# Altium PCB Controller_Board.PcbDoc (part 1 of 2)
Units mm, origin at the board's own origin, x right, y up, seen from the top; angles counter-clockwise.
Board outline 35 x 30 mm, 4 copper layers (Top Layer, L2 (GND), L3 (PWR), Bottom Layer), stack 1.503 mm thick; 48 components, 52 nets, 230 pads, 106 vias.
Unrouted connection lines stored in the file: 17.
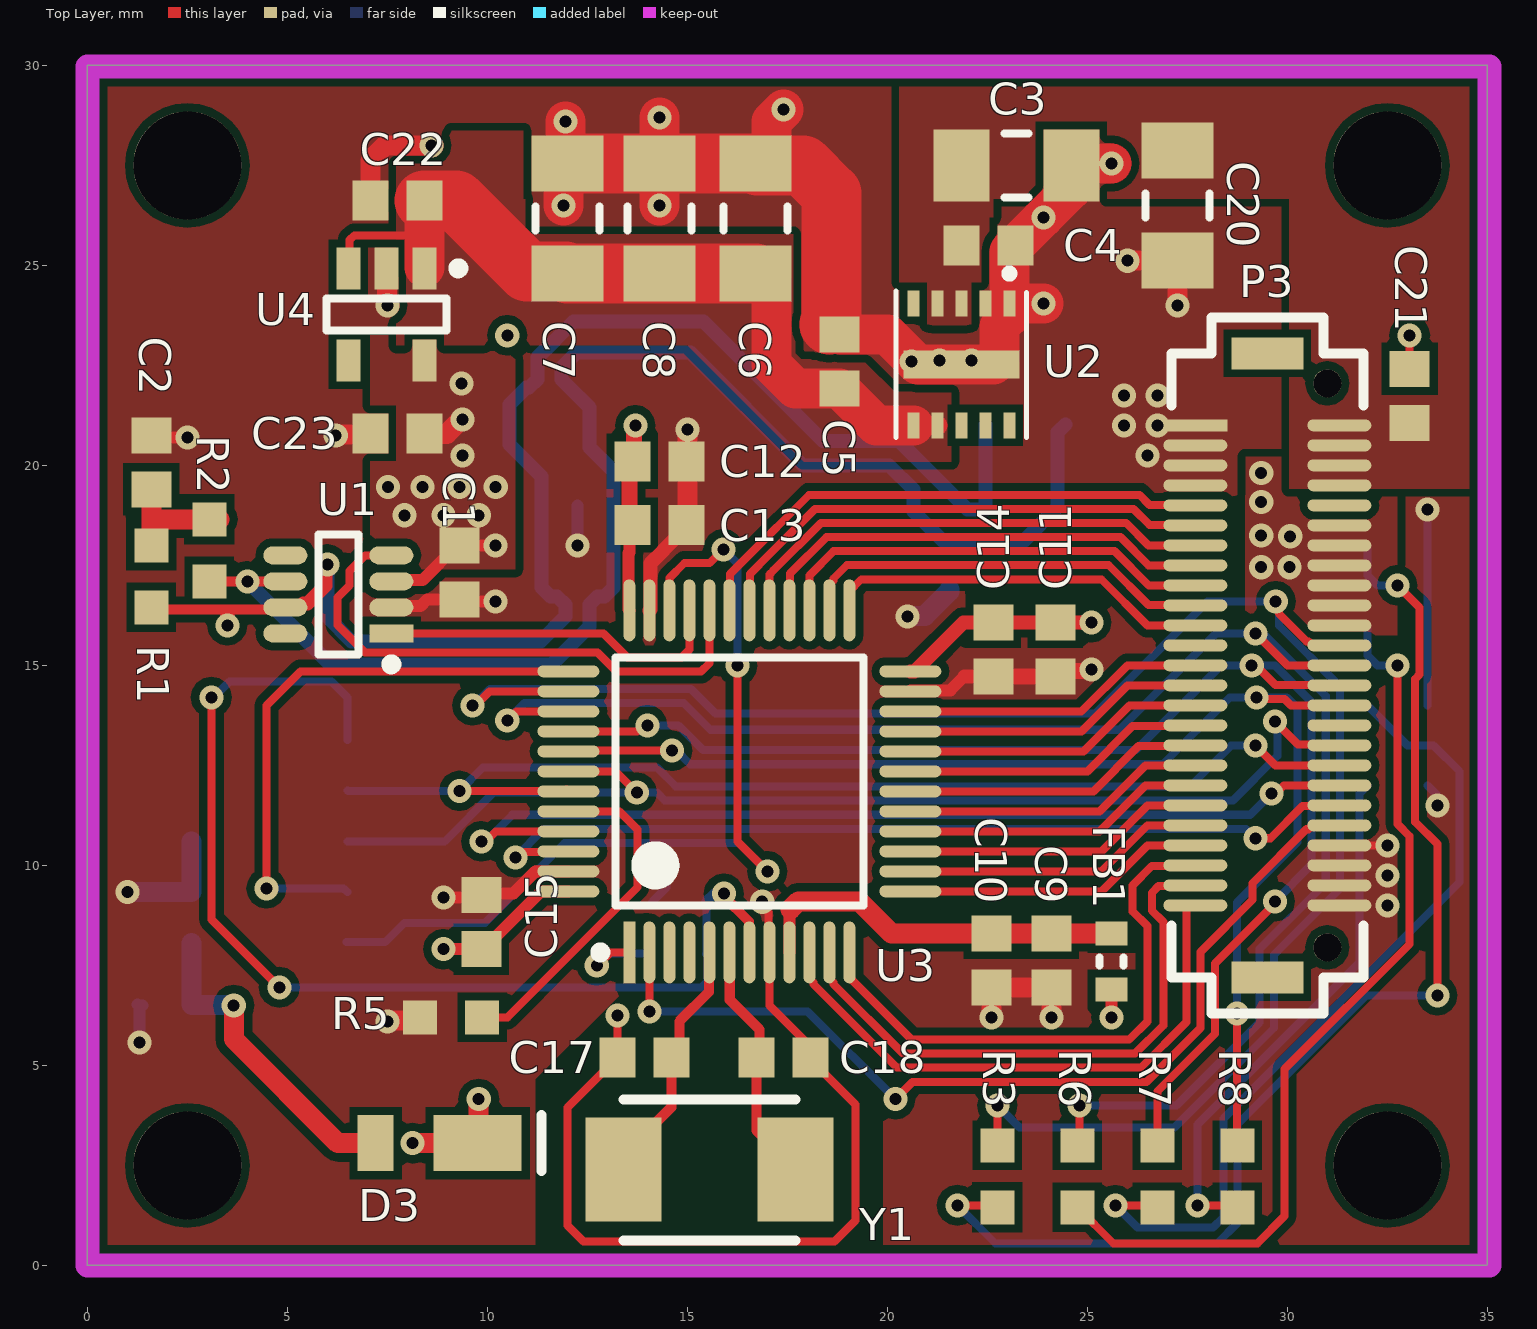
[diagram p0: Top Layer view]
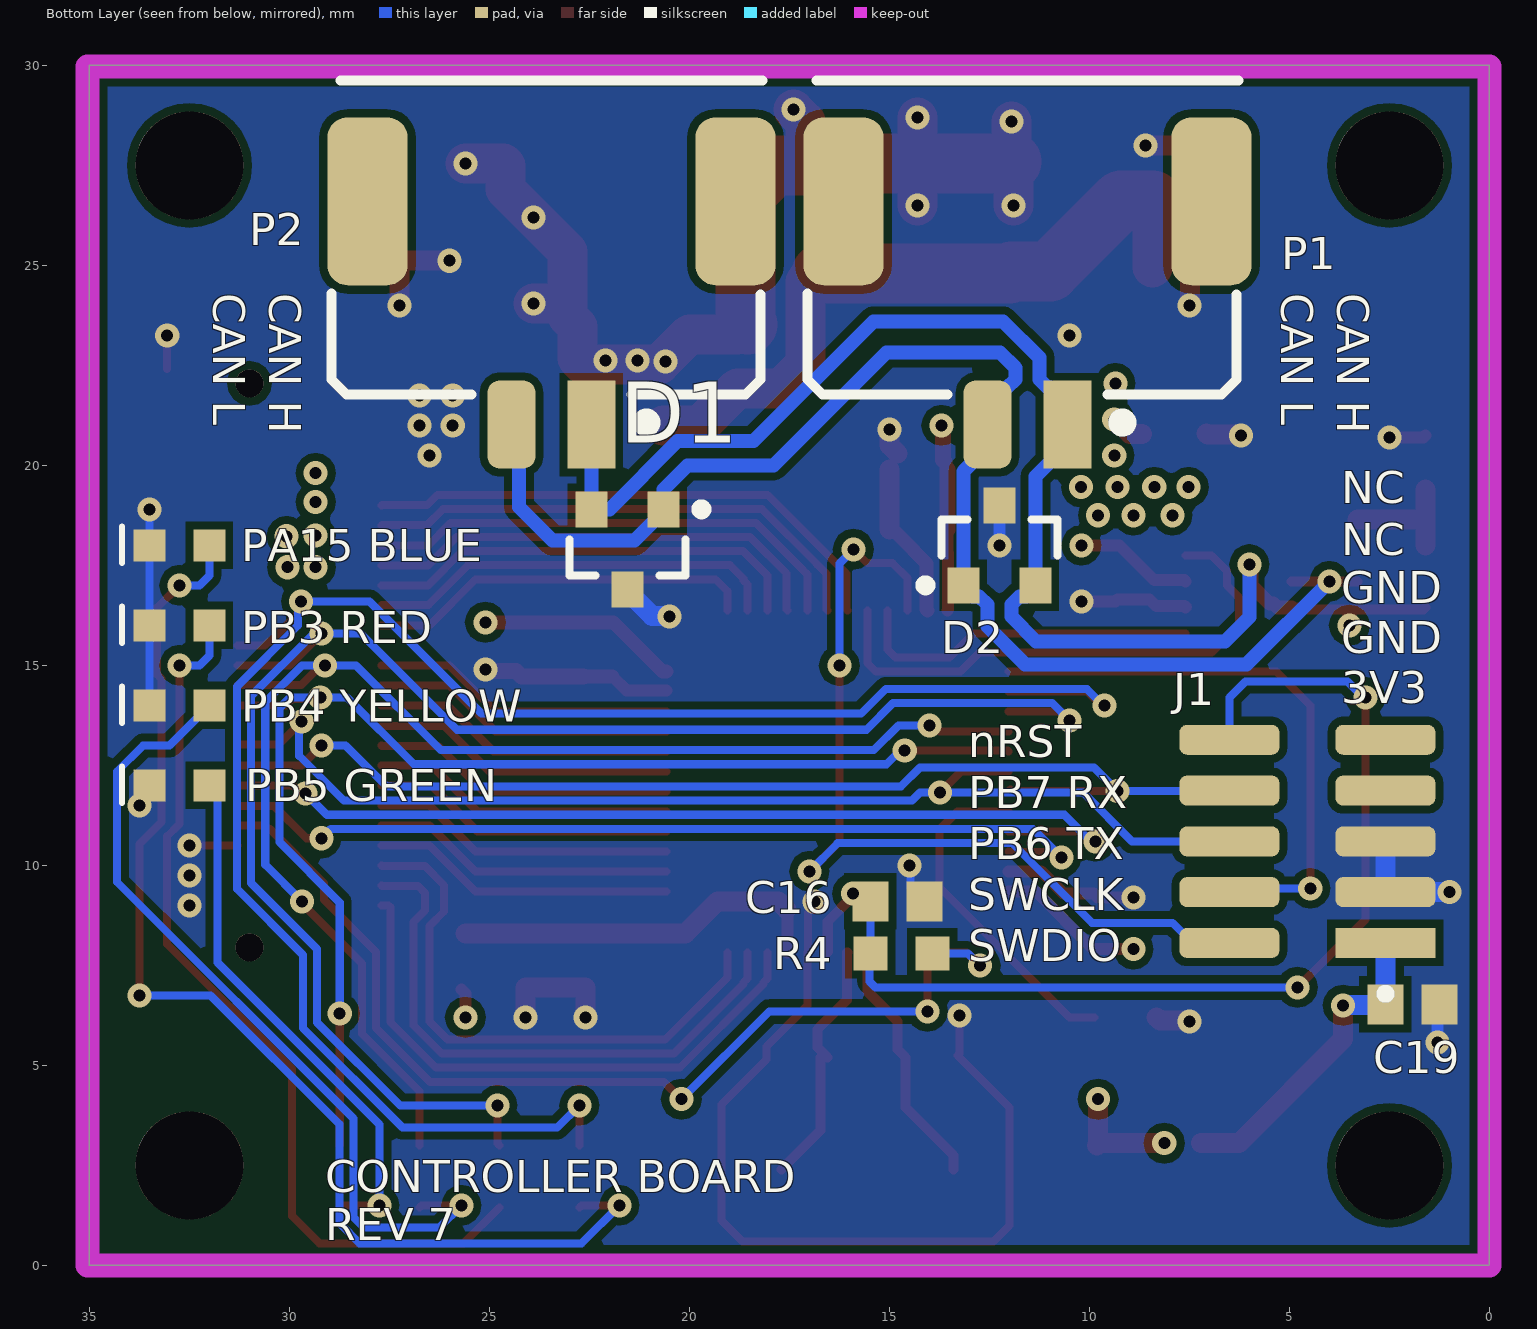
[diagram p1: Bottom Layer view, seen from below]
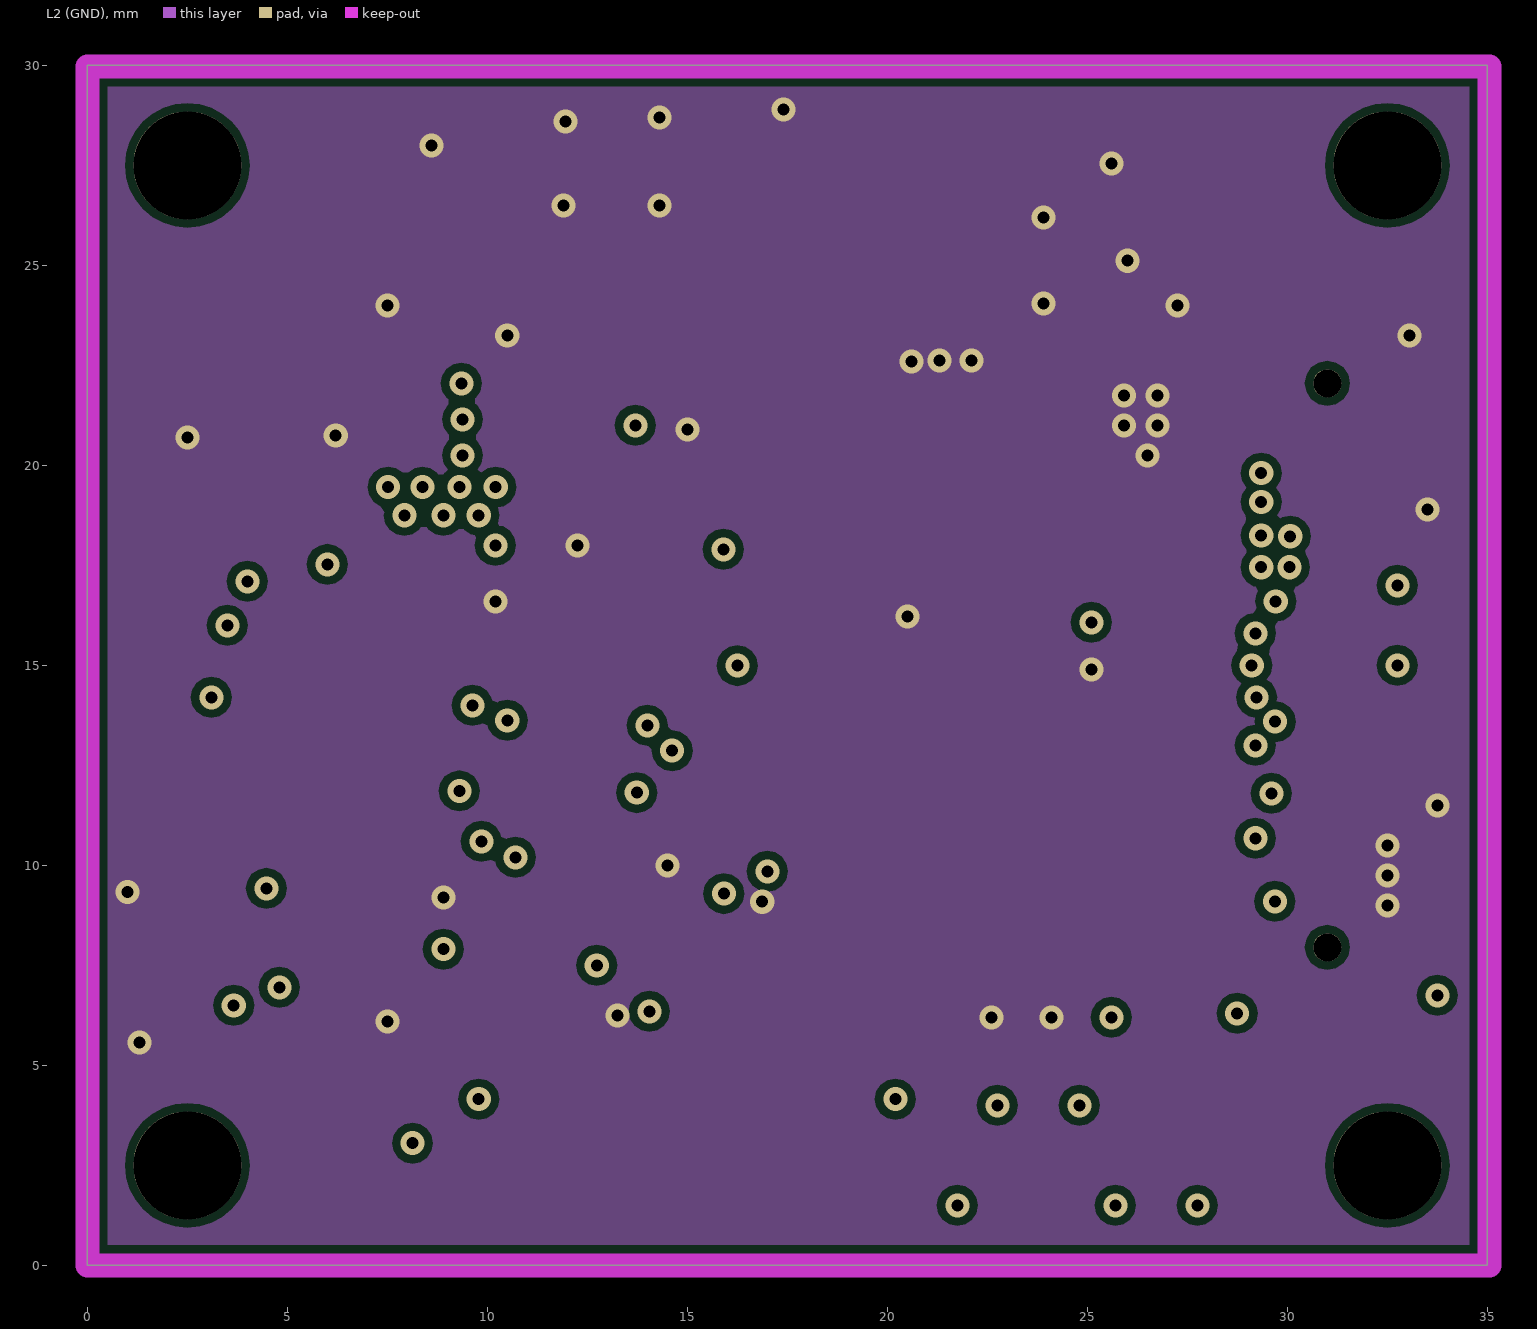
[diagram p2: L2 (GND)]
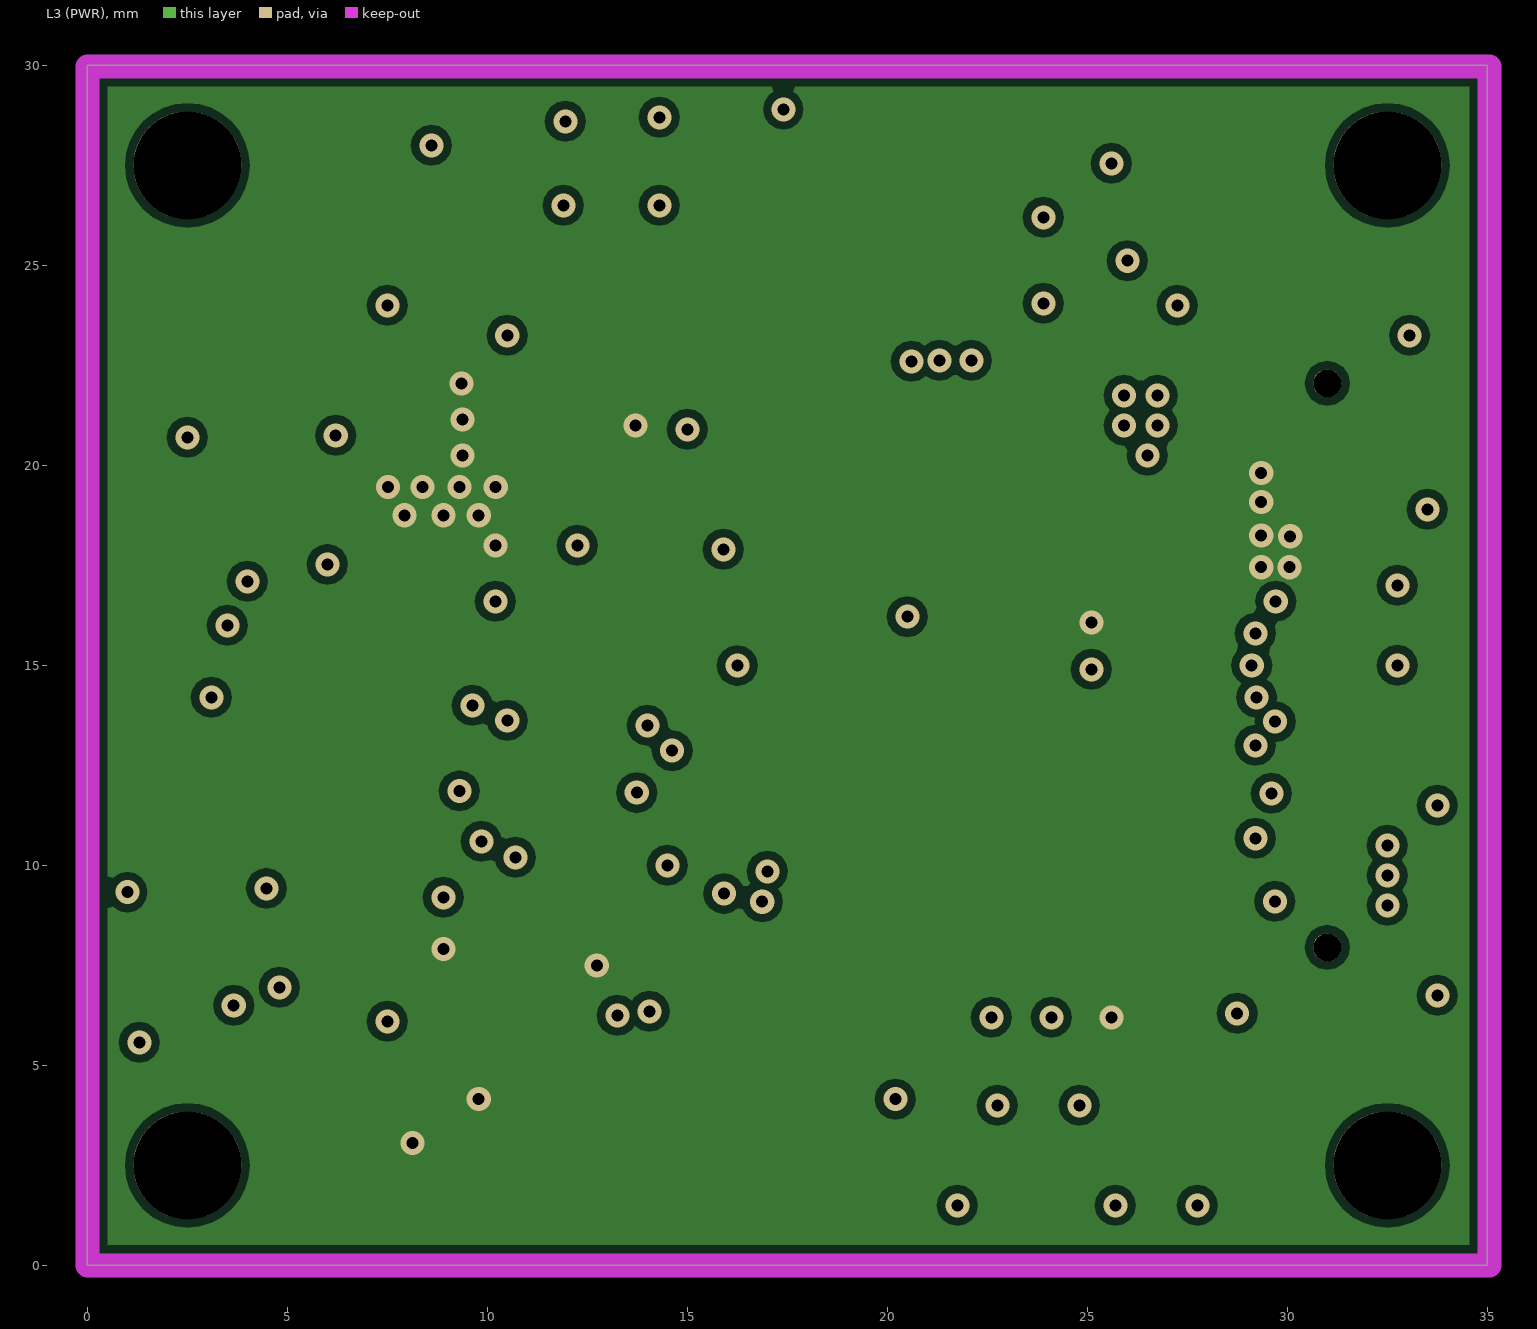
[diagram p3: L3 (PWR)]
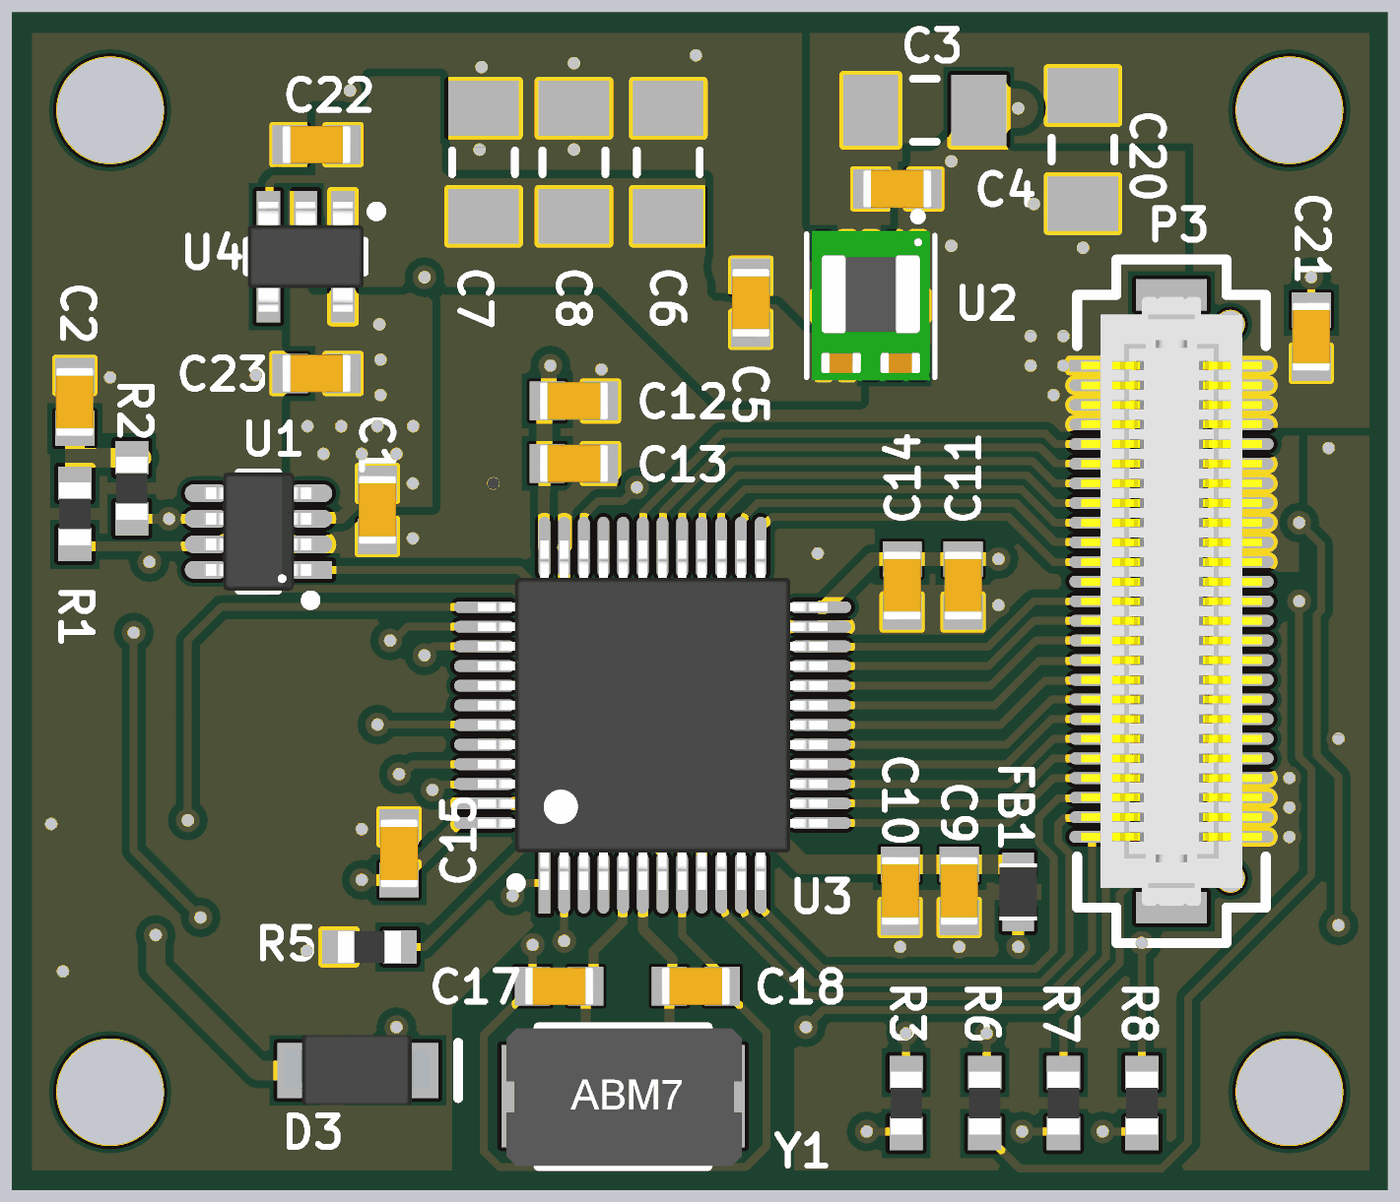
[diagram p4: 3D render of the assembled board from above, using the file's embedded part models]
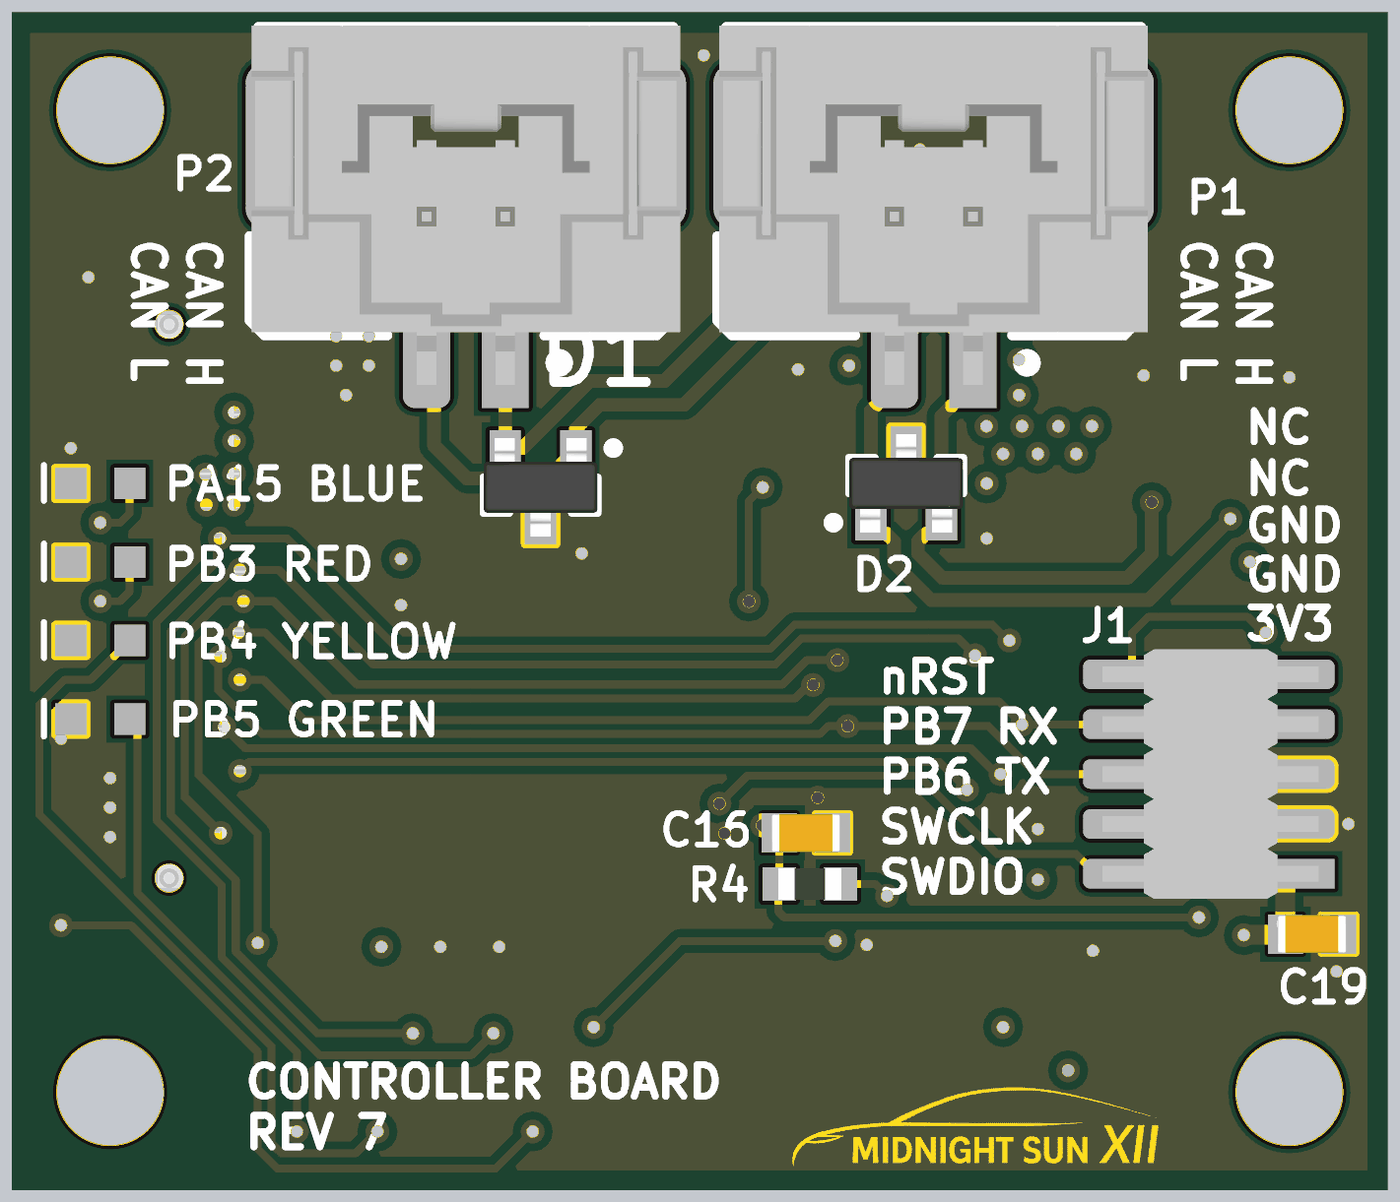
[diagram p5: 3D render of the assembled board from below, using the file's embedded part models]

## Layer stack, top to bottom
Top Solder: solder mask 0.0254, SM-001, Dk 4
Top Layer: signal copper 0.0356
Dielectric 2: prepreg 0.2083, PP-022, Dk 4.5
L2 (GND): signal copper 0.0178
Dielectric 3: core 0.98, Core-039, Dk 4.8
L3 (PWR): signal copper 0.0178
Dielectric 4: prepreg 0.2083, PP-022, Dk 4.5
Bottom Layer: signal copper 0.0356
Bottom Solder: solder mask 0.0254, SM-001, Dk 4

## Board outline
0,0 35,0 35,30 0,30

## Design rules (kind name [scope] priority, off if disabled: settings)
Clearance [All] p1: gap=0.152 ignorepadtopadclearanceinfootprint=TRUE except(0: Arc-Hole Track-Hole SMDPad-Hole THPad-Hole Via-Hole Fill-Hole Poly-Hole Region-Hole Text-Hole; 0.2: Arc-Poly Track-Poly SMDPad-Poly THPad-Poly Via-Poly Fill-Poly Poly-Poly Poly-Region Poly-Text)
ComponentClearance ComponentClearance_LEDs [InComponent('P3') vs InComponent('D2') or InComponent('D3') or InComponent('D4') or InComponent('D5')] p1: gap=0.254 collisioncheckmode=3 verticalgap=0 showdistances=FALSE
ComponentClearance [All] p2: gap=0.254 collisioncheckmode=3 verticalgap=0.254 showdistances=FALSE
DiffPairsRouting [InDifferentialPair('CAN')] p1: maxlimit=0.254 minlimit=0.2 mostfreqgap=0.254 toplayer_minwidth=0.2 toplayer_maxwidth=0.381 toplayer_prefwidth=0.254 midlayer1_minwidth=0.2 midlayer1_maxwidth=0.381 midlayer1_prefwidth=0.254 midlayer2_minwidth=0.2 midlayer2_maxwidth=0.381 midlayer2_prefwidth=0.254 bottomlayer_minwidth=0.2 bottomlayer_maxwidth=0.381 bottomlayer_prefwidth=0.254 maxuncoupledlength=25
HoleSize [All] p1: absolutevalues=TRUE maxlimit=3 minlimit=0.025 maxpercent=80.000 minpercent=20.000
MinimumSolderMaskSliver [All] p1: minsoldermaskwidth=0
PlaneClearance [All] p1: clearance=0.4
PlaneConnect [All] p1: planeconnectstyle=Direct reliefexpansion=0 reliefentries=4 reliefconductorwidth=0.254 reliefairgap=0.254
PolygonConnect [IsPad] p1: connectstyle=Direct reliefconductorwidth=0.254 reliefentries=4 polygonreliefangle="90 Angle" airgapwidth=0.254
PolygonConnect PolygonConnect_Via [Not(IsPad)] p2: connectstyle=Direct reliefconductorwidth=0.254 reliefentries=4 polygonreliefangle="90 Angle" airgapwidth=0.254
RoutingVias [All] p1: holewidth=0.3 width=0.6 viastyle="Through Hole" minholewidth=0.3 minwidth=0.6 maxholewidth=6.3 maxwidth=6.605
SilkToSilkClearance [All] p1: silktosilkclearance=0.15
SilkToSolderMaskClearance [IsPad] p1: minsilkscreentomaskgap=0.15 clearancetoexposedcopper=TRUE
SolderMaskExpansion [All] p1: expansion=0.102
Width [All] p1: maxlimit=5 minlimit=0.152 preferedwidth=0.2
22 further rules are at their usual default settings.

## Classes and differential pairs
component class "Controller Board - Microcontroller": C9 C10 C11 C12 C13 C14 C15 C16 C17 C18 FB1 "PA15 BLUE" "PB3 RED" "PB4 YELLOW" "PB5 GREEN" R3 R4 R5 R6 R7 R8 U3 Y1
component class "Controller Board - Connectors": C19 C20 C21 D1 D2 D3 J1 P1 P2 P3
component class Controller_Board: C1 C2 C3 C4 C5 C6 C7 C8 C22 C23 R1 R2 U1 U2 U4
differential pair CAN: +CAN_P -CAN_N

## Components (designator, comment, footprint, x,y, rotation, side; value= is the part's Value field where it differs from the comment)
C1 "CAP CER 0.1UF 50V 10% X7R 0603" "CAP, 0603" 9.3,17.325 r270 top
C2 "CAP CER 10nF 50V 5% X7R 0603" "CAP, 0603" 1.6,20.075 r90 top
C3 "CAP CER 10uF 50V 20% X5R 1206" "CAP, 1206" 23.225,27.5 r0 top
C4 "CAP CER 0.1UF 50V 10% X7R 0603" "CAP, 0603" 22.525,25.5 r0 top
C5 "CAP CER 0.1UF 50V 10% X7R 0603" "CAP, 0603" 18.8,22.6 r90 top
C6 "CAP CER 47uF 6.3V X5R 1206" "CAP, 1206" 16.7,26.175 r90 top
C7 "CAP CER 47uF 6.3V X5R 1206" "CAP, 1206" 12,26.175 r90 top
C8 "CAP CER 47uF 6.3V X5R 1206" "CAP, 1206" 14.3,26.175 r90 top
C9 "CAP CER 1UF 50V 10% X7R 0603" "CAP, 0603" 24.1,7.625 r270 top
C10 "CAP CER 10nF 50V 5% X7R 0603" "CAP, 0603" 22.6,7.625 r270 top
C11 "CAP CER 4.7UF 25V 10% X5R 0603" "CAP, 0603" 24.2,15.4 r270 top
C12 "CAP CER 4.7UF 25V 10% X5R 0603" "CAP, 0603" 14.3,20.1 r0 top
C13 "CAP CER 0.1UF 50V 10% X7R 0603" "CAP, 0603" 14.3,18.509 r0 top
C14 "CAP CER 0.1UF 50V 10% X7R 0603" "CAP, 0603" 22.65,15.4 r270 top
C15 "CAP CER 0.1UF 50V 10% X7R 0603" "CAP, 0603" 9.85,8.581 r90 top
C16 "CAP CER 0.1UF 50V 10% X7R 0603" "CAP, 0603" 14.8,9.1 r0 bottom
C17 "CAP CER 15PF 50V ±5% NPO 0603" "CAP, 0603" 13.925,5.2 r0 top
C18 "CAP CER 15PF 50V ±5% NPO 0603" "CAP, 0603" 17.4,5.2 r180 top
C19 "CAP CER 10nF 50V 5% X7R 0603" "CAP, 0603" 1.925,6.525 r180 bottom
C20 "CAP CER 10uF 50V 20% X5R 1206" "CAP, 1206" 27.25,26.5 r270 top
C21 "CAP CER 0.1UF 50V 10% X7R 0603" "CAP, 0603" 33.055,21.736 r90 top
C22 "CAP CER 0.1UF 50V 10% X7R 0603" "CAP, 0603" 7.75,26.625 r180 top
C23 "CAP CER 4.7UF 25V 10% X5R 0603" "CAP, 0603" 7.75,20.8 r180 top
D1 "DIODE TVS 24VWM 70VC SOT23" "MOSFET P-CH 30V 3.8A SOT-23" 21.55,17.9 r270 bottom
D2 "DIODE TVS 24VWM 70VC SOT23" "MOSFET P-CH 30V 3.8A SOT-23" 12.25,18 r90 bottom
D3 "DIODE SCHOTTKY 30V 1A POWERDI123" "DIODE SCHOTTKY 30V 1A POWERDI123" 7.205,3.055 r0 top
FB1 "FB 600 OHM 1LN 0603" "FB 0603" 25.6,7.6 r90 top
J1 "CONN 10POS HEADR MALE 0.05\"" "CONN, 10POS 0.05\" Debug Header" 2.6,8.06 r90 bottom locked
P1 "Dura-Clik" "CONN, 2POS Dura-Click Vertical" 10.55,21.02 r0 bottom locked
P2 "Dura-Clik" "CONN, 2POS Dura-Click Vertical" 22.45,21.02 r0 bottom locked
P3 "CONN 50POS Bergstak Receptacle 0.02\"" "CONN, Bergstak 50 Pos Receptacle" 29.5,15 r0 top locked
"PA15 BLUE" "LED BLUE CLEAR 2.8V 0603" LED_0603 32.05,18.01 r0 bottom (schematic designator LED1)
"PB3 RED" "LED RED CLEAR 2V 0603" LED_0603 32.05,16.01 r0 bottom (schematic designator LED2)
"PB4 YELLOW" "LED YELLOW CLEAR 2.1V 0603" LED_0603 32.05,14.01 r0 bottom (schematic designator LED3)
"PB5 GREEN" "LED GREEN CLEAR 2V 0603" LED_0603 32.05,12.01 r0 bottom (schematic designator LED4)
R1 "62R" "RES, 0603" 1.6,17.225 r90 top value=62
R2 "62R" "RES, 0603" 3.05,17.875 r270 top value=62
R3 "RES 510 OHM 5% 1/10W 0603" "RES, 0603" 22.75,2.225 r270 top
R4 "RES 100K OHM 5% 1/8W 0603" "RES, 0603" 14.7,7.8 r180 bottom
R5 "RES 510 OHM 5% 1/10W 0603" "RES, 0603" 9.095,6.2 r0 top
R6 "RES 510 OHM 5% 1/10W 0603" "RES, 0603" 24.75,2.225 r270 top
R7 "RES 510 OHM 5% 1/10W 0603" "RES, 0603" 26.75,2.225 r270 top
R8 "RES 510 OHM 5% 1/10W 0603" "RES, 0603" 28.75,2.225 r270 top
U1 "IC CAN Tranceiver TCAN332DR" TSOP65P280X145-8N 6.275,16.775 r180 top
U2 "IC DC DC 3.3V 1A 10-uSIP" "IC DCDC 3.3V 1A 10-uSIP" 21.85,22.525 r270 top
U3 "IC MCU 32BIT 128KB FLASH 48LQFP" TSQFP50P890X890X160-48M 16.3,12.1 r90 top locked
U4 "IC IDEAL DIODE CURRENT SWITCH SOT23-5" SOT95P280X145-5N 7.475,23.775 r270 top
Y1 "CRYSTAL 32 MHz 18PF 2-SMD" "CRYSTAL ABM7" 13.4,2.4 r0 top

## Footprints (in the part's own frame and the unit in brackets; to place one, negate y for a bottom-side part, rotate by r counter-clockwise, add the part's x,y. Pads: shape width x height; smd on the part's side, far side on the other; paste and mask are expansions set on the pad)
"CAP, 0603" [mm] "Chip Capacitor, 2-Leads, Body 1.60x0.81mm, IPC Medium Density"
  rect 0.9x1 smd mask+0.076: 1(-0.675,0) 2(0.675,0)
  body extent -0.87,-0.48 0.88,0.48, height 0.9
"CAP, 1206" [mm] "Chip Capacitor, 2-Leads, Body 3.20x1.60mm, IPC Medium Density"
  rect 1.4x1.8 smd: 1(-1.375,0) 2(1.375,0)
  silkscreen extent -0.3,-0.8 0.3,0.8, body extent -1.68,-0.87 1.67,0.87, height 1.8
"CONN, 2POS Dura-Click Vertical" [mm] "WM7169CT-ND"
  rect 1.2x2.2 smd: 1(0,0)
  rrect50% 1.2x2.2 smd: 2(2,0)
  rrect50% 2x4.2 smd: 3(-3.6,-5.58) 3(5.6,-5.58)
  silkscreen extent -4.28,-8.6 6.5,0.05, body extent -4.45,-8.64 6.45,0.51, height 8
"CONN, 10POS 0.05\" Debug Header" [mm] "Amphenol 10 Positions Header Connector 0.050\" (1.27mm) Surface Mount Gold"
  rect 0.75x2.5 smd: 1(0,0)
  rrect50% 0.75x2.5 smd: 2(0,3.9) 3(1.27,0) 4(1.27,3.9) 5(2.54,0) 6(2.54,3.9) 7(3.81,0) 8(3.81,3.9) 9(5.08,0) 10(5.08,3.9)
  silkscreen extent -1.37,-0.1 -1.17,0.1, body extent -0.64,-0.84 5.71,4.65, height 4.5
"CONN, Bergstak 50 Pos Receptacle" [mm] "Bergstak 50 Position Receptacle"
  rect 1.6x0.3 smd: 1(-1.8,6)
  oval 1.6x0.3 smd: 2(-1.8,5.5) 3(-1.8,5) 4(-1.8,4.5) 5(-1.8,4) 6(-1.8,3.5) 7(-1.8,3) 8(-1.8,2.5) 9(-1.8,2) 10(-1.8,1.5) 11(-1.8,1) 12(-1.8,0.5) 13(-1.8,0) 14(-1.8,-0.5) 15(-1.8,-1) 16(-1.8,-1.5) 17(-1.8,-2) 18(-1.8,-2.5) 19(-1.8,-3) 20(-1.8,-3.5) 21(-1.8,-4) 22(-1.8,-4.5) 23(-1.8,-5) 24(-1.8,-5.5) 25(-1.8,-6) 26(1.8,-6) 27(1.8,-5.5) 28(1.8,-5) 29(1.8,-4.5) 30(1.8,-4) 31(1.8,-3.5) 32(1.8,-3) 33(1.8,-2.5) 34(1.8,-2) 35(1.8,-1.5) 36(1.8,-1) 37(1.8,-0.5) 38(1.8,0) 39(1.8,0.5) 40(1.8,1) 41(1.8,1.5) 42(1.8,2) 43(1.8,2.5) 44(1.8,3) 45(1.8,3.5) 46(1.8,4) 47(1.8,4.5) 48(1.8,5) 49(1.8,5.5) 50(1.8,6)
  rect 1.8x0.8 smd: ""(0,-7.8) ""(0,7.8)
  round 0.7 hole 0.7: ""(1.5,-7.05) ""(1.5,7.05)
  silkscreen extent -2.4,-8.7 2.4,8.7, body extent -2.3,-7.75 2.3,7.75, height 2.6
"CRYSTAL ABM7" [mm] "32MHz ±20ppm Crystal 18pF 50 Ohms 2-SMD, No Lead"
  rect 1.9x2.6 smd: 1(0,0) 2(4.3,0)
  silkscreen extent 0,-1.78 4.3,1.75, body extent -0.82,-1.78 5.17,1.73, height 1.4
"DIODE SCHOTTKY 30V 1A POWERDI123" [mm] "Diodes Incorporated DFLS130L-7"
  rect 0.9x1.4 smd: 1(0,0)
  rect 2.2x1.4 smd: 2(2.55,0)
  silkscreen extent 4.15,-0.7 4.15,0.7, body extent -0.27,-0.88 3.42,0.9, height 0.98
"FB 0603" [mm] "Ferrite Bead, 0603"
  rect 0.6x0.8 smd: 1(-0.7,0) 2(0.7,0)
  silkscreen extent -0.1,-0.3 0.1,0.3, body extent -0.72,-0.48 0.73,0.48, height 0.95
"IC DCDC 3.3V 1A 10-uSIP" [mm] "LMZM23601"
  rect 0.65x0.3 smd: 1(-1.525,1.2) 2(-1.525,0.6) 3(-1.525,0) 4(-1.525,-0.6) 5(-1.525,-1.2) 6(1.525,-1.2) 7(1.525,-0.6) 8(1.525,0) 9(1.525,0.6) 10(1.525,1.2)
  rect 0.7x2.9 smd: 11(0,0)
  silkscreen extent -2.37,-1.63 1.83,1.63, body extent -1.9,-1.5 1.9,1.5, height 1.58
LED_0603 [mm]
  rect 0.8x0.8 smd: 1(-0.05,0.01) 2(1.45,0.01)
  silkscreen extent 2.13,-0.46 2.13,0.45, body extent -0.09,-0.39 1.51,0.41, height 0.8
"MOSFET P-CH 30V 3.8A SOT-23" [mm] "SOT23, 3-Leads, Body 2.85x2.40mm, Pitch 0.90mm, IPC Medium Density"
  rect 0.9x0.8 smd: 1(-1,0.9) 2(-1,-0.9) 3(1,0)
  silkscreen extent -1.12,-1.45 0.65,1.97, body extent -1.25,-1.45 1.25,1.45, height 1.1
"RES, 0603" [mm] "Chip Resistor, 2-Leads, Body 1.60x0.80mm, IPC Medium Density"
  rect 0.85x0.85 smd: 1(-0.775,0) 2(0.775,0)
  body extent -0.8,-0.4 0.8,0.4, height 0.55
SOT95P280X145-5N [mm] "SOT23, 5-Leads, Body 2.95x2.80mm, Pitch 0.95mm, IPC Medium Density"
  rect 1.05x0.6 smd: 1(-1.15,0.95) 2(-1.15,0) 3(-1.15,-0.95) 4(1.15,-0.95) 5(1.15,0.95)
  silkscreen extent -1.27,-1.5 0.4,1.93, body extent -1.4,-1.48 1.4,1.48, height 1.45
TSOP65P280X145-8N [mm] "TSOP, 8-Leads, Body 2.90x1.60mm, Pitch 0.65mm, IPC Medium Density"
  rect 1.1x0.45 smd: 1(-1.325,0.975)
  oval 1.1x0.45 smd: 2(-1.325,0.325) 3(-1.325,-0.325) 4(-1.325,-0.975) 5(1.325,-0.975) 6(1.325,-0.325) 7(1.325,0.325) 8(1.325,0.975)
  silkscreen extent -1.45,-1.5 0.5,1.87, body extent -1.39,-1.5 1.39,1.5, height 1.45
TSQFP50P890X890X160-48M [mm] "TSQFP, 48-Leads, Body 7.00x7.00mm, Pitch 0.50mm, IPC Low Density"
  rect 1.55x0.3 smd: 1(-4.275,2.75)
  oval 1.55x0.3 smd: 2(-4.275,2.25) 3(-4.275,1.75) 4(-4.275,1.25) 5(-4.275,0.75) 6(-4.275,0.25) 7(-4.275,-0.25) 8(-4.275,-0.75) 9(-4.275,-1.25) 10(-4.275,-1.75) 11(-4.275,-2.25) 12(-4.275,-2.75) 25(4.275,-2.75) 26(4.275,-2.25) 27(4.275,-1.75) 28(4.275,-1.25) 29(4.275,-0.75) 30(4.275,-0.25) 31(4.275,0.25) 32(4.275,0.75) 33(4.275,1.25) 34(4.275,1.75) 35(4.275,2.25) 36(4.275,2.75)
  oval 0.3x1.55 smd: 13(-2.75,-4.275) 14(-2.25,-4.275) 15(-1.75,-4.275) 16(-1.25,-4.275) 17(-0.75,-4.275) 18(-0.25,-4.275) 19(0.25,-4.275) 20(0.75,-4.275) 21(1.25,-4.275) 22(1.75,-4.275) 23(2.25,-4.275) 24(2.75,-4.275) 37(2.75,4.275) 38(2.25,4.275) 39(1.75,4.275) 40(1.25,4.275) 41(0.75,4.275) 42(0.25,4.275) 43(-0.25,4.275) 44(-0.75,4.275) 45(-1.25,4.275) 46(-1.75,4.275) 47(-2.25,4.275) 48(-2.75,4.275)
  silkscreen extent -4.4,-3.1 3.1,3.6, body extent -4.45,-4.45 4.45,4.45, height 1.6

## Part data
C1 C4 C5 C13 C14 C15 C16 C21 C22: "0.10µF ±10% 50V Ceramic Capacitor X7R 0603 (1608 Metric)", Capacitance=0.1µF, Manufacturer 1="AVX Corporation", Manufacturer Part Number 1=06035C104KAT2A, Operating Temperature="-55°C ~ 125°C", Package / Case="0603 (1608 Metric)", Ratings=-, Supplier Part Number 1=478-5052-1-ND, Temperature Coefficient=X7R, Tolerance=±10%, Voltage=50V, ComponentLink1Description=http://datasheets.avx.com/X7RDielectric.pdf, ComponentLink1URL=http://datasheets.avx.com/X7RDielectric.pdf, Height - Seated (Max)=-, Lead Spacing=-, Lead Style=-, Mounting Type="Surface Mount, MLCC", Packaging="Cut Tape (CT)", Part Status=Active, Size / Dimension="0.063\" L x 0.032\" W (1.60mm x 0.81mm)", Supplier 1=Digi-Key, Thickness (Max)="0.035\" (0.90mm)"
C2 C10 C19: "10000pF ±5% 50V Ceramic Capacitor U2J 0603 (1608 Metric)", Capacitance=10000pF, Manufacturer 1=KEMET, Manufacturer Part Number 1=C0603C103J5JAC7867, Operating Temperature="-55°C ~ 125°C", Package / Case="0603 (1608 Metric)", Ratings=-, Supplier Part Number 1=399-13384-1-ND, Temperature Coefficient=U2J, Tolerance=±5%, Voltage=50V, ComponentLink1Description=http://www.kemet.com/docfinder?Partnumber=C0603C103J5JAC7867, ComponentLink1URL=http://www.kemet.com/docfinder?Partnumber=C0603C103J5JAC7867, Failure Rate=-, Height - Seated (Max)=-, Lead Spacing=-, Lead Style=-, Mounting Type="Surface Mount, MLCC", Packaging="Cut Tape (CT)", Part Status=Active, Size / Dimension="0.063\" L x 0.032\" W (1.60mm x 0.80mm)", Supplier 1=Digi-Key, Thickness (Max)="0.034\" (0.87mm)"
C3 C20: "10µF ±20% 50V Ceramic Capacitor X5R 1206 (3216 Metric)", Capacitance="10 uF", Case/Package=1206, Case Code (Metric)=3216, Manufacturer=Murata, Manufacturer Part Number=GRT31CR61H106ME01L, Max Operating Temperature=85°C, Min Operating Temperature=-55°C, Rating=X5R, Ratings=AEC-Q200, Supplier Part Number 1=490-12457-1-ND, Tolerance=20%, Voltage Rating=50V, Case Code (Imperial)=1206, Length=0.126inch, Mount="Surface Mount", Packaging="Tape and Reel", Pricing 1="1 = 0.57000, 10 = 0.39800, 100 = 0.23910, 500 = 0.17930, 1000 = 0.15141 (USD)", RoHS=Yes, Stock 1=449467, Supplier 1=Digi-Key, Thickness=0.071inch, Width=0.063inch
C6 C7 C8: "47µF ±20% 6.3V Ceramic Capacitor X5R 1206 (3216 Metric)", Capacitance=47uF, Case/Package=1206, Case Code (Metric)=3216, Dielectric=X5R, Manufacturer=Samsung, Manufacturer Part Number=CL31A476MQHNNNE, Max Operating Temperature=85°C, Min Operating Temperature=-55°C, Package Quantity=1, Supplier Part Number 1=1276-1167-1-ND, Tolerance=20%, Voltage=6.3V, Case Code (Imperial)=1206, ComponentLink1Description=http://www.samsungsem.com/kr/support/product-search/mlcc/CL31A476MQHNNNE.jsp?src-supplier=Digi-Key, ComponentLink1URL=http://www.samsungsem.com/kr/support/product-search/mlcc/CL31A476MQHNNNE.jsp?src-supplier=Digi-Key, ComponentLink2Description=https://www.verical.com/server-webapp/html/getDatasheet?partID=358369&src-supplier=Verical, ComponentLink2URL=https://www.verical.com/server-webapp/html/getDatasheet?partID=358369&src-supplier=Verical, ComponentLink3Description=http://www1.futureelectronics.com/doc/SAMSUNG/CL31A476MQHNNNE.pdf?src-supplier=Future+Electronics, ComponentLink3URL=http://www1.futureelectronics.com/doc/SAMSUNG/CL31A476MQHNNNE.pdf?src-supplier=Future+Electronics, ComponentLink4Description=https://produktinfo.conrad.com/datenblaetter/450000-474999/452054-da-01-en-VS_KONDENSATOR_1206.pdf?src-supplier=Conrad, ComponentLink4URL=https://produktinfo.conrad.com/datenblaetter/450000-474999/452054-da-01-en-VS_KONDENSATOR_1206.pdf?src-supplier=Conrad, Contact Plating=Tin, Depth=1.6mm, Height=1.6mm, Length=3.2mm, Material=Ceramic, Mount="Surface Mount", Packaging="Tape and Reel", Pricing 1="1 = 0.44000, 10 = 0.30600, 100 = 0.18340, 500 = 0.13754, 1000 = 0.11614 (USD)", Radiation Hardening=No, RoHS=Yes, Stock 1=888566, Supplier 1=Digi-Key, Thickness=0.071inch, Voltage Rating=6.3V, Width=0.063inch
C9: "1µF ±10% 50V Ceramic Capacitor X7R 0603 (1608 Metric)", Capacitance=1µF, Manufacturer 1="Taiyo Yuden", Manufacturer Part Number 1=UMK107AB7105KA-T, Operating Temperature="-55°C ~ 125°C", Package / Case="0603 (1608 Metric)", Ratings=-, Supplier Part Number 1=587-3247-1-ND, Temperature Coefficient=X7R, Tolerance=±10%, Voltage=50V, ComponentLink1Description=http://www.yuden.co.jp/productdata/catalog/en/mlcc_all_e.pdf, ComponentLink1URL=http://www.yuden.co.jp/productdata/catalog/en/mlcc_all_e.pdf, Height - Seated (Max)=-, Lead Spacing=-, Lead Style=-, Mounting Type="Surface Mount, MLCC", Packaging="Cut Tape (CT)", Part Status=Active, Size / Dimension="0.063\" L x 0.031\" W (1.60mm x 0.80mm)", Supplier 1=Digi-Key, Thickness (Max)="0.037\" (0.95mm)"
C11 C12 C23: "4.7µF ±10% 25V Ceramic Capacitor X5R 0603 (1608 Metric)", Capacitance=4.7µF, Manufacturer 1="Murata Electronics North America", Manufacturer Part Number 1=GRM188R61E475KE11D, Operating Temperature="-55°C ~ 85°C", Package / Case="0603 (1608 Metric)", Ratings=-, Supplier Part Number 1=490-7203-1-ND, Temperature Coefficient=X5R, Tolerance=±10%, Voltage=25V, ComponentLink1Description=http://www.murata.com/~/media/webrenewal/support/library/catalog/products/capacitor/mlcc/c02e.ashx, ComponentLink1URL=http://www.murata.com/~/media/webrenewal/support/library/catalog/products/capacitor/mlcc/c02e.ashx, Height - Seated (Max)=-, Lead Spacing=-, Lead Style=-, Mounting Type="Surface Mount, MLCC", Packaging="Cut Tape (CT)", Part Status=Active, Size / Dimension="0.063\" L x 0.031\" W (1.60mm x 0.80mm)", Supplier 1=Digi-Key, Thickness (Max)="0.031\" (0.80mm)"
C17 C18: "15pF ±5% 50V Ceramic Capacitor C0G, NP0 0603 (1608 Metric)", Capacitance=15pF, Manufacturer 1=Yageo, Manufacturer Part Number 1=CC0603JRNPO9BN150, Operating Temperature="-55°C ~ 125°C", Package / Case="0603 (1608 Metric)", Ratings=-, Supplier Part Number 1=311-1060-1-ND, Temperature Coefficient="C0G, NP0", Tolerance=±5%, Voltage=50V, ComponentLink1Description=http://www.yageo.com/documents/recent/UPY-GP_NP0_16V-to-50V_16.pdf, ComponentLink1URL=http://www.yageo.com/documents/recent/UPY-GP_NP0_16V-to-50V_16.pdf, Failure Rate=-, Height - Seated (Max)=-, Lead Spacing=-, Lead Style=-, Mounting Type="Surface Mount, MLCC", Packaging="Cut Tape (CT)", Part Status=Active, Size / Dimension="0.063\" L x 0.031\" W (1.60mm x 0.80mm)", Supplier 1=Digi-Key, Thickness (Max)="0.035\" (0.90mm)"
D1 D2: "TVS DIODE 24VWM 70VC SOT23", Capacitance @ Frequency="11pF @ 1MHz", Current - Peak Pulse (10/1000µs)="3A (8/20µs)", Manufacturer 1="Nexperia USA Inc.", Manufacturer Part Number 1=PESD1CAN,215, Operating Temperature="-65°C ~ 150°C (TA)", Package / Case="TO-236-3, SC-59, SOT-23-3", Power - Peak Pulse=200W, Power Line Protection=No, Supplier Device Package="SOT-23 (TO-236AB)", Supplier Part Number 1=1727-3817-1-ND, Voltage - Breakdown (Min)=25.4V, Voltage - Clamping (Max) @ Ipp=70V, ComponentLink1Description=http://assets.nexperia.com/documents/data-sheet/PESD1CAN.pdf, ComponentLink1URL=http://assets.nexperia.com/documents/data-sheet/PESD1CAN.pdf, Mounting Type="Surface Mount", Packaging="Cut Tape (CT)", Part Status=Active, Supplier 1=Digi-Key, Type=Zener
D3: "Diode Schottky 30V 1A Surface Mount PowerDI™ 123", Capacitance @ Vr, F="76pF @ 10V, 1MHz", Current - Average Rectified (Io)=1A, Current - Reverse Leakage @ Vr="1mA @ 30V", Manufacturer="Diodes Incorporated", Manufacturer Part Number=DFLS130L-7, Operating Temperature - Junction="-40°C ~ 125°C", Package / Case=POWERDI®123, Supplier Device Package="PowerDI™ 123", Supplier Part Number 1=DFLS130LDICT-ND, Voltage - DC Reverse (Vr) (Max)=30V, Voltage - Forward (Vf) (Max) @ If="310mV @ 1A", Category="Discrete Semiconductor Products", ComponentLink1Description=https://www.diodes.com/assets/Datasheets/ds30492.pdf, ComponentLink1URL=https://www.diodes.com/assets/Datasheets/ds30492.pdf, Diode Type=Schottky, Mounting Type="Surface Mount", Packaging="Cut Tape (CT)", Part Status=Active, Pricing 1="1=0.7, 10=0.599, 100=0.447, 500=0.35126, 1000=0.27142 (CAD)", RoHS="RoHS Compliant", Speed="Fast Recovery =< 500ns, > 200mA (Io)", Stock 1=68200, Supplier 1=Digi-Key
FB1: "FERRITE BEAD 600 OHM 0603 1LN", Case/Package=0603, Case Code (Metric)=1608, DC Resistance (DCR)=400mR, Manufacturer=TDK, Manufacturer Part Number=MMZ1608Y601BTD25, Max Current Rating=500mA, Max Operating Temperature=125°C, Min Operating Temperature=-55°C, Package Quantity=4000, Ratings=AEC-Q200, Supplier Part Number 1=445-172850-1-ND, Test Frequency=100MHz, Tolerance=25%, Case Code (Imperial)=0603, Height=0.037inch, Impedance=600R, Length=0.063inch, Max DC Current=500mA, Mount="Surface Mount", Number of Lines=1, Packaging="Tape and Reel", Pricing 1="1 = 0.10000, 10 = 0.07600, 25 = 0.06840, 50 = 0.05000, 100 = 0.04330, 250 = 0.03416, 500 = 0.02884, 1000 = 0.02429 (USD)", RoHS=Yes, Stock 1=19540, Supplier 1=Digi-Key, Termination=SMD/SMT, Weight=7.1E-05oz, Width=0.031inch
J1: "10 Positions Header Connector 0.050\" (1.27mm) Surface Mount Gold", Current Rating=-, Insulation Color=Black, Manufacturer 1="Amphenol FCI", Manufacturer Part Number 1=20021121-00010C4LF, Material Flammability Rating="UL94 V-0", Supplier Part Number 1=609-3695-1-ND, ComponentLink1Description=http://portal.fciconnect.com/Comergent//fci/drawing/20021121.pdf, ComponentLink1URL=http://portal.fciconnect.com/Comergent//fci/drawing/20021121.pdf, Connector Type=Header, Contact Finish - Mating=Gold, Contact Finish - Post=Tin, Contact Finish Thickness - Mating="10µin (0.25µm)", Contact Finish Thickness - Post="50µin (1.27µm)", Contact Length - Mating="0.120\" (3.05mm)", Contact Length - Post=-, Contact Material="Copper Alloy", Contact Shape=Square, Contact Type="Male Pin", Fastening Type=-, Ingress Protection=-, Insulation Height=-, Insulation Material=Thermoplastic, Mated Stacking Heights=-, Mounting Type="Surface Mount", Number of Positions=10, Number of Positions Loaded=All, Number of Rows=2, Operating Temperature=-, Overall Contact Length=-, Packaging="Cut Tape (CT)", Part Status=Active, Pitch - Mating="0.050\" (1.27mm)", Row Spacing - Mating="0.050\" (1.27mm)", Shrouding=Unshrouded, Style="Board to Board", Supplier 1=Digi-Key, Termination=Solder, Voltage=-
P1 P2: library part "CONN 2POS DURA-CLIK 0.079\" VERT", "2 Positions Header, Shrouded Connector 0.079\" (2.00mm) Surface Mount, Vertical Tin", Current Rating=-, Insulation Color=Natural, Manufacturer="Molex, LLC", Manufacturer Part Number=5600200220, Supplier Part Number 1=WM10862CT-ND, Applications="Automotive, Industrial", Category="Connectors, Interconnects", ComponentLink1Description=http://www.molex.com/pdm_docs/sd/5600200220_sd.pdf, ComponentLink1URL=http://www.molex.com/pdm_docs/sd/5600200220_sd.pdf, Connector Type=Header, Contact Finish - Mating=Tin, Contact Finish - Post=Tin, Contact Finish Thickness - Mating=-, Contact Finish Thickness - Post=-, Contact Length - Mating=-, Contact Length - Post=-, Contact Material="Copper Alloy", Contact Shape=Square, Contact Type="Male Pin", Fastening Type="Latch Lock", Features="Solder Retention", Ingress Protection=-, Insulation Height="0.315\" (8.00mm)", Insulation Material="Polyamide (PA), Nylon", Mated Stacking Heights=9.3mm, Material Flammability Rating=-, Mounting Type="Surface Mount", Number of Positions=2, Number of Positions Loaded=All, Number of Rows=1, Operating Temperature=-, Overall Contact Length=-, Packaging="Cut Tape (CT)", Part Status=Active, Pitch - Mating="0.079\" (2.00mm)", Pricing 1="1=1.16, 10=1.012, 25=0.952, 50=0.9122, 100=0.8727, 250=0.79336 (CAD)", RoHS="RoHS Compliant", Row Spacing - Mating=-, Shrouding="Shrouded - 4 Wall", Stock 1=11912, Style="Board to Cable/Wire", Supplier 1=Digi-Key, Termination=Solder, Voltage Rating=-
P3: "50 Position Connector Receptacle, Center Strip Contacts Surface Mount Gold", Manufacturer 1="Amphenol FCI", Manufacturer Part Number 1=10132798-052100LF, Supplier Part Number 1=609-5227-1-ND, ComponentLink1Description=http://portal.fciconnect.com/Comergent//fci/drawing/10132798.pdf, ComponentLink1URL=http://portal.fciconnect.com/Comergent//fci/drawing/10132798.pdf, Connector Type="Receptacle, Center Strip Contacts", Contact Finish=Gold, Contact Finish Thickness="1µin (0.025µm)", Height Above Board="0.106\" (2.70mm)", Mated Stacking Heights="5mm, 5.5mm, 6mm", Mounting Type="Surface Mount", Number of Positions=50, Number of Rows=2, Packaging="Cut Tape (CT)", Part Status=Active, Pitch="0.020\" (0.50mm)", Series="BergStak Receptacle", Supplier 1=Digi-Key
"PA15 BLUE": "Blue 470nm LED Indication - Discrete 2.8V 0603 (1608 Metric)", Color=Blue, Current - Test=5mA, Lens Color=Colorless, Manufacturer 1="Lite-On Inc.", Manufacturer Part Number 1=LTST-C193TBKT-5A, Millicandela Rating=15mcd, Package / Case="0603 (1608 Metric)", Supplier Device Package="Chip LED", Supplier Part Number 1=160-1827-1-ND, Voltage - Forward (Vf) (Typ)=2.8V, ComponentLink1Description=http://optoelectronics.liteon.com/upload/download/DS22-2004-060/P_100_LTST-C193TBKT-5A.pdf, ComponentLink1URL=http://optoelectronics.liteon.com/upload/download/DS22-2004-060/P_100_LTST-C193TBKT-5A.pdf, Height (Max)=0.45mm, Lens Style/Size="Rectangle with Flat Top, 1.15mm x 0.80mm", Lens Transparency=Clear, Mounting Type="Surface Mount", Packaging="Cut Tape (CT)", Part Status=Active, Size / Dimension="1.60mm L x 0.80mm W", Supplier 1=Digi-Key, Viewing Angle=130°, Wavelength - Dominant=470nm, Wavelength - Peak=468nm
"PB3 RED": "Red 631nm LED Indication - Discrete 2V 0603 (1608 Metric)", Color=Red, Current - Test=20mA, Lens Color=Colorless, Manufacturer="Wurth Electronics Inc.", Manufacturer Part Number=150060RS75000, Millicandela Rating=250mcd, Package / Case="0603 (1608 Metric)", Supplier Device Package=0603, Supplier Part Number 1=732-4978-1-ND, Voltage - Forward (Vf) (Typ)=2V, Category=Optoelectronics, ComponentLink1Description=http://katalog.we-online.de/led/datasheet/150060RS75000.pdf, ComponentLink1URL=http://katalog.we-online.de/led/datasheet/150060RS75000.pdf, Features=-, Height (Max)=0.80mm, Lens Style/Size="Rectangle with Flat Top, 1.10mm x 0.70mm", Lens Transparency=Clear, Mounting Type="Surface Mount", Packaging="Cut Tape (CT)", Part Status=Active, Pricing 1="1=0.21, 100=0.1617, 500=0.13964 (CAD)", RoHS="RoHS Compliant", Size / Dimension="1.60mm L x 0.80mm W", Stock 1=35521, Supplier 1=Digi-Key, Viewing Angle=140°, Wavelength - Dominant=625nm, Wavelength - Peak=630nm
"PB4 YELLOW": "Yellow 590nm LED Indication - Discrete 2V 0603 (1608 Metric)", Color=Yellow, Current - Test=20mA, Lens Color=Colorless, Manufacturer="Wurth Electronics Inc.", Manufacturer Part Number=150060YS75000, Millicandela Rating=120mcd, Package / Case="0603 (1608 Metric)", Supplier Device Package=0603, Supplier Part Number 1=732-4981-1-ND, Voltage - Forward (Vf) (Typ)=2V, Category=Optoelectronics, ComponentLink1Description=http://katalog.we-online.de/led/datasheet/150060YS75000.pdf, ComponentLink1URL=http://katalog.we-online.de/led/datasheet/150060YS75000.pdf, Features=-, Height (Max)=0.80mm, Lens Style/Size="Rectangle with Flat Top, 1.10mm x 0.70mm", Lens Transparency=Clear, Mounting Type="Surface Mount", Packaging="Cut Tape (CT)", Part Status=Active, Pricing 1="1=0.21, 100=0.1617, 500=0.13964 (CAD)", RoHS="RoHS Compliant", Size / Dimension="1.60mm L x 0.80mm W", Stock 1=10523, Supplier 1=Digi-Key, Viewing Angle=140°, Wavelength - Dominant=590nm, Wavelength - Peak=595nm
"PB5 GREEN": "Green 572nm LED Indication - Discrete 2V 0603 (1608 Metric)", Color=Green, Current - Test=20mA, Lens Color=Colorless, Manufacturer="Wurth Electronics Inc.", Manufacturer Part Number=150060VS75000, Millicandela Rating=40mcd, Package / Case="0603 (1608 Metric)", Supplier Device Package=0603, Supplier Part Number 1=732-4980-1-ND, Voltage - Forward (Vf) (Typ)=2V, Category=Optoelectronics, ComponentLink1Description=http://katalog.we-online.de/led/datasheet/150060VS75000.pdf, ComponentLink1URL=http://katalog.we-online.de/led/datasheet/150060VS75000.pdf, Features=-, Height (Max)=0.80mm, Lens Style/Size="Rectangle with Flat Top, 1.10mm x 0.70mm", Lens Transparency=Clear, Mounting Type="Surface Mount", Packaging="Cut Tape (CT)", Part Status=Active, Pricing 1="1=0.21, 100=0.1617, 500=0.13964 (CAD)", RoHS="RoHS Compliant", Size / Dimension="1.60mm L x 0.80mm W", Stock 1=9408, Supplier 1=Digi-Key, Viewing Angle=140°, Wavelength - Dominant=570nm, Wavelength - Peak=572nm
R1 R2: library part "RES 62 OHM 0.1% 1/10W 0603", "62 Ohms ±0.1% 0.1W, 1/10W Chip Resistor 0603 (1608 Metric) Automotive AEC-Q200 Thin Film", Manufacturer="Panasonic Electronic Components", Manufacturer Part Number=ERA-3AEB620V, Operating Temperature="-55°C ~ 155°C", Package / Case="0603 (1608 Metric)", Power (Watts)="0.1W, 1/10W", Supplier Device Package=0603, Supplier Part Number 1=P62DBCT-ND, Temperature Coefficient=±25ppm/°C, Tolerance=±0.1%, Category=Resistors, ComponentLink1Description=https://industrial.panasonic.com/cdbs/www-data/pdf/RDM0000/AOA0000C307.pdf, ComponentLink1URL=https://industrial.panasonic.com/cdbs/www-data/pdf/RDM0000/AOA0000C307.pdf, Composition="Thin Film", Failure Rate=-, Features="Automotive AEC-Q200", Height - Seated (Max)="0.022\" (0.55mm)", Packaging="Cut Tape (CT)", Part Status=Active, Pricing 1="1=0.52, 10=0.447, 100=0.1748, 1000=0.07317, 2500=0.06708 (CAD)", RoHS="RoHS Compliant", Size / Dimension="0.063\" L x 0.032\" W (1.60mm x 0.80mm)", Stock 1=10320, Supplier 1=Digi-Key
R3 R5 R6 R7 R8: "RES SMD 510 OHM 5% 1/10W 0603", Manufacturer 1=Yageo, Manufacturer Part Number 1=RC0603JR-07510RL, Operating Temperature="-55°C ~ 155°C", Package / Case="0603 (1608 Metric)", Power=1/10W, Resistance=510, Supplier Device Package=0603, Supplier Part Number 1=311-510GRCT-ND, Temperature Coefficient=±100ppm/°C, Tolerance=±5%, ComponentLink1Description=http://www.yageo.com/documents/recent/PYu-RC_Group_51_RoHS_L_7.pdf, ComponentLink1URL=http://www.yageo.com/documents/recent/PYu-RC_Group_51_RoHS_L_7.pdf, Composition="Thick Film", Failure Rate=-, Height - Seated (Max)="0.022\" (0.55mm)", Packaging="Cut Tape (CT)", Part Status=Active, Size / Dimension="0.063\" L x 0.031\" W (1.60mm x 0.80mm)", Supplier 1=Digi-Key
R4: "RES SMD 100K OHM 5% 1/10W 0603", Manufacturer 1=Yageo, Manufacturer Part Number 1=RC0603JR-07100KL, Operating Temperature="-55°C ~ 155°C", Package / Case="0603 (1608 Metric)", Power=1/10W, Resistance=100k, Supplier Device Package=0603, Supplier Part Number 1=311-100KGRCT-ND, Temperature Coefficient=±100ppm/°C, Tolerance=±5%, ComponentLink1Description=http://www.yageo.com/documents/recent/PYu-RC_Group_51_RoHS_L_7.pdf, ComponentLink1URL=http://www.yageo.com/documents/recent/PYu-RC_Group_51_RoHS_L_7.pdf, Composition="Thick Film", Failure Rate=-, Height - Seated (Max)="0.022\" (0.55mm)", Packaging="Cut Tape (CT)", Part Status=Active, Size / Dimension="0.063\" L x 0.031\" W (1.60mm x 0.80mm)", Supplier 1=Digi-Key
U1: "1/1 Transceiver CANbus SOT-23-8", Manufacturer="Texas Instruments", Manufacturer Part Number=TCAN332DCNR, Max Operating Temperature=125°C, Min Operating Temperature=-40°C, Supplier Part Number 1=296-47355-1-ND, Lead Free="Lead Free", Pricing 1="1 = 2.27000, 10 = 2.04200, 100 = 1.64100, 500 = 1.34828, 1000 = 1.11714 (USD)", Stock 1=2387, Supplier 1=Digi-Key
U2: "Non-Isolated PoL Module DC DC Converter 1 Output 3.3V 1A 4V - 36V Input", Manufacturer="Texas Instruments", Manufacturer Part Number=LMZM23601V3SILR, Max Operating Temperature=125°C, Min Operating Temperature=-40°C, Supplier Part Number 1=296-51381-1-ND, ComponentLink1Description=Datasheet, ComponentLink1URL=http://www.ti.com/lit/ds/symlink/lmzm23601.pdf, Pricing 1="1 = 5.76000, 10 = 5.17700, 100 = 4.24200, 500 = 3.61110, 1000 = 3.04550 (USD)", Stock 1=1291, Supplier 1=Digi-Key
U3: "ARM® Cortex®-M0 STM32 F0 Microcontroller IC 32-Bit 48MHz 128KB (128K x 8) FLASH 48-LQFP (7x7)", Manufacturer 1=STMicroelectronics, Manufacturer Part Number 1=STM32F072CBT6, Operating Temperature="-40°C ~ 85°C (TA)", Package / Case=48-LQFP, Supplier Device Package="48-LQFP (7x7)", Supplier Part Number 1=497-14645-ND, Voltage - Supply (Vcc/Vdd)="1.65 V ~ 3.6 V", ComponentLink1Description=http://www.st.com/content/ccc/resource/technical/document/datasheet/cd/46/43/83/22/d3/40/c8/DM00090510.pdf/files/DM00090510.pdf/jcr:content/translations/en.DM00090510.pdf, ComponentLink1URL=http://www.st.com/content/ccc/resource/technical/document/datasheet/cd/46/43/83/22/d3/40/c8/DM00090510.pdf/files/DM00090510.pdf/jcr:content/translations/en.DM00090510.pdf, Connectivity="CAN, HDMI-CEC, I²C, IrDA, LIN, SPI, UART/USART, USB", Core Processor="ARM® Cortex®-M0", Core Size=32-Bit, Data Converters="A/D 10x12b, D/A 2x12b", EEPROM Size=-, Number of I/O=37, Oscillator Type=Internal, Packaging=Tray, Part Status=Active, Peripherals="DMA, I²S, POR, PWM, WDT", Program Memory Size="128KB (128K x 8)", Program Memory Type=FLASH, RAM Size="16K x 8", Speed=48MHz, Supplier 1=Digi-Key
U4: "OR Controller Source Selector Switch P-Channel 1:1 SOT-23-5", Manufacturer=Maxim, Manufacturer Part Number=MAX40200AUK+T, Supplier Part Number 1=MAX40200AUK+TCT-ND, ComponentLink1Description=Datasheet, ComponentLink1URL=https://datasheets.maximintegrated.com/en/ds/MAX40200.pdf, Pricing 1="1 = 0.93000, 10 = 0.82100, 100 = 0.62930, 500 = 0.49750, 1000 = 0.39799 (USD)", Stock 1=7780, Supplier 1=Digi-Key
Y1: "32MHz ±20ppm Crystal 18pF 50 Ohms 2-SMD, No Lead", Case/Package=CSMD, ESR (Equivalent Series Resistance)=50R, Frequency=32MHz, Frequency Stability=30ppm, Frequency Tolerance=20ppm, Load Capacitance=18pF, Manufacturer=Abracon, Manufacturer Part Number=ABM7-32.000MHZ-D2Y-T, Max Operating Temperature=85°C, Min Operating Temperature=-40°C, Package Quantity=1000, Supplier Part Number 1=535-9850-1-ND, ComponentLink1Description=https://abracon.com/Resonators/abm3.pdf, ComponentLink1URL=https://abracon.com/Resonators/abm3.pdf, ComponentLink2Description=http://www.farnell.com/datasheets/947971.pdf?src-supplier=Element14, ComponentLink2URL=http://www.farnell.com/datasheets/947971.pdf?src-supplier=Element14, ComponentLink3Description=http://www.abracon.com/Resonators/abm7.pdf?src-supplier=Future+Electronics, ComponentLink3URL=http://www.abracon.com/Resonators/abm7.pdf?src-supplier=Future+Electronics, ComponentLink4Description=http://www.abracon.com/Resonators/abm7.pdf?src-supplier=Digi-Key, ComponentLink4URL=http://www.abracon.com/Resonators/abm7.pdf?src-supplier=Digi-Key, ComponentLink5Description=https://abracon.com/Resonators/abm7.pdf?src-supplier=Digi-Key, ComponentLink5URL=https://abracon.com/Resonators/abm7.pdf?src-supplier=Digi-Key, ComponentLink6Description=http://www.abracon.com/Resonators/abm7.pdf?src-supplier=Avnet, ComponentLink6URL=http://www.abracon.com/Resonators/abm7.pdf?src-supplier=Avnet, Composition=Ceramic, Depth=3.5mm, Height=0.055inch, Lead Free="Lead Free", Length=6mm, Mount="Surface Mount", Number of Pins=2, Packaging="Tape and Reel", Pricing 1="1 = 1.00000, 10 = 0.88600, 50 = 0.82780, 100 = 0.73150, 500 = 0.69300 (USD)", Radiation Hardening=No, REACH SVHC=Unknown, RoHS=Yes, Series Resistance=50R, Stock 1=3351, Supplier 1=Digi-Key, Termination=SMD/SMT, Tolerance=20ppm, Width=3.3mm

## Free pads (board coordinates)
  round 2.7 hole 2.7: ""(2.5,2.5) ""(2.5,27.5) ""(32.5,2.5) ""(32.5,27.5)

## Via types
v1: diameter 0.605, hole 0.3, Top Layer to Bottom Layer, tented both sides, 106 vias

## Nets (pads, with @x,y where several pads share a name; then routed paths per layer and width w, separated by ;. In a path a pad name is that pad's centre, name@x,y a point inside that pad or via, vN(x,y) a via of type N, cw(c..) or ccw(c..) an arc to the next point about the centre after c; other vN are vias at no path point)
3V3: C1.1 C11.1 C12.1 C13.1 C14.1 C15.1 C23.1 D3.2 FB1.1 P3.40 P3.41 P3.42 P3.43 P3.44 P3.45 R4.2 U1.3 U3.1 U3.24 U3.36 U3.48 U4.5 | length 22.9
  Top Layer w0.2: v1(12.735,7.5) 12.75,7.5 13.075,7.825 U3.1
  Top Layer w0.3: U1.3 7.629,17.129 8.379,17.129 9.25,18 C1.1 v1(10.2,18) ; v1(8.9,7.906) C15.1 9.9,7.906 11.345,9.35 U3.48 ; U3.36 13.534,16.391 13.534,17.805 13.55,17.82 C13.1@13.55,18.4 ; v1(25.6,6.2) 25.6,6.8 FB1.1@25.7,6.9
  Top Layer w0.35: U3.24 20.675,14.85 21.9,16.075 C14.1 C11.1 v1(25.1,16.075)
  Top Layer w0.4: C13.1@13.55,18.4 C12.1@13.55,19.9 ; C12.1 13.662,20.137 13.662,20.962 v1(13.7,21)
  Top Layer w0.5: v1(8.129,3.055) D3.2 ; C23.1@8.688,20.787 8.988,20.787 9.35,21.15 v1(9.379,21.15) ; v1(9.785,4.155) 9.785,3.085 D3.2 ; D3.2@9.81,3 D3.2
  Bottom Layer w0.2: v1(12.735,7.5) 13.035,7.8 R4.2
  other v1: 29.346,17.454 30.052,17.454 30.071,18.227 29.346,18.25 7.925,18.752 8.9,18.752 9.785,18.752 29.346,19.084 7.52,19.456 8.379,19.456 9.3,19.456 10.209,19.456 29.346,19.808 9.379,20.25 9.35,22.05
3V3A: C9.1 C10.1 FB1.2 U3.9 | length 9.5
  Top Layer w0.3: U3.9 17.55,8.874 17.576,8.9
  Top Layer w0.5: 17.576,8.9 17.776,9.1 19.3,9.1 20.1,8.3 22.7,8.3 24.2,8.3 FB1.2
BOOT0: R5.2 U3.44 | length 8.6
  Top Layer w0.2: R5.2 10.498,6.2 13.751,9.453 13.751,10.899 13.3,11.35 U3.44
CAN_N: D1.1 D2.1 P1.2 P2.2 R2.2 U1.6 | length 36.1
  Top Layer w0.254: R2.2@3.3,17.1 v1(4,17.1) U1.6
  Bottom Layer w0.35: v1(4,17.1) 6.073,15.027 11.612,15.027 12.552,15.967 12.552,16.52 12.757,16.725 12.925,16.725 13.15,16.95 D2.1 13.15,19.852 12.55,20.452 P1.2 12.55,21.452 12.057,21.945 11.852,22.15 11.852,22.44 12.235,22.823 15.073,22.823 17.896,20 20.046,20 20.65,19.396 D1.1 20.65,18.85 21.377,18.123 23.423,18.123 24.258,18.958 24.258,20.828 P2.2
CAN_P: D1.2 D2.2 P1.1 P2.1 R1.1 U1.7 | length 36.4
  Top Layer w0.254: R1.1 1.654,16.396 4.518,16.396 4.572,16.45 U1.7
  Top Layer w0.35: v1(3.5,16) 3.5,16.348 ; U1.7 5.302,16.45 5.4,16.548 5.504,16.548 5.829,16.873 5.949,16.993 5.949,17.057 5.951,17.059 5.951,17.351 6,17.4 v1(6,17.522)
  Bottom Layer w0.35: v1(6,17.522) 6,16.207 6.607,15.6 11.33,15.6 11.948,16.218 11.948,16.52 11.743,16.725 11.575,16.725 11.35,16.95 D2.2 11.35,19.72 10.55,20.52 P1.1 10.55,21.52 10.975,21.945 11.043,21.945 11.248,22.15 11.248,22.69 12.158,23.6 15.4,23.6 18.396,20.604 20.296,20.604 22,18.9 D1.2 ; D1.2@22.45,18.95 P2.1
GND: "PA15 BLUE.2" "PB3 RED.2" "PB4 YELLOW.2" "PB5 GREEN.2" C1.2 C2.2 C3.2 C4.2 C5.2 C6.2 C7.2 C8.2 C9.2 C10.2 C11.2 C12.2 C13.2 C14.2 C15.2 C16.1 C17.1 C18.1 C19.2 C20.2 C21.2 C22.2 C23.2 D1.3 D2.3 J1.3 J1.5 P3.1 P3.2 P3.3 P3.4 P3.26 P3.27 P3.28 P3.29 R5.1 U1.2 U2.1 U2.2 U2.11 U3.8 U3.23 U3.35 U3.47 U4.2 | length 92.9
  Top Layer w0.2: v1(13.25,6.25) 13.25,5.3 13.3,5.25 12,3.95 12,1 12.4,0.6 18.675,0.6 19.2,1.125 19.2,4.025 18.075,5.15 C18.1 18.075,5.475 17.05,6.5 U3.8 17.031,7.844 17.031,8.821 16.871,8.981 v1(16.871,9.091) ; P3.29 v1(32.5,10.5) ; C21.2 v1(33.055,23.25)
  Top Layer w0.3: C2.2 1.65,20.7 v1(2.5,20.7) ; U1.2@7.585,16.465 U1.2 7.629,16.479 8.329,16.479 8.5,16.65 C1.2 9.35,16.6 v1(10.2,16.6) ; v1(8.9,9.2) 9.794,9.2 C15.2 9.892,9.298 10.653,9.298 11.205,9.85 U3.47 ; U3.23@20.575,14.373 21.573,14.373 21.925,14.725
  Top Layer w0.35: U3.35 14.073,16.398 14.073,17.543 14.402,17.873 14.402,17.886 14.975,18.459 C13.2 ; 21.925,14.725 C14.2
  Top Layer w0.4: C14.2 C11.2 24.336,14.861 25.061,14.861 v1(25.1,14.9)
  Top Layer w0.5: v1(6.21,20.75) 6.23,20.77 7.045,20.77 C23.2 ; C22.2 7.075,27.625 7.45,28 v1(8.6,28) ; U4.2 7.488,24.912 7.488,24.012 v1(7.5,24) ; v1(7.5,6.1) 7.52,6.12 8.24,6.12 R5.1 ; C12.2@14.8,20.3 15,20.5 v1(15,20.9) ; C13.2@15,18.4 C12.2@15,19.9 ; v1(22.6,6.2) C10.2 ; C10.2 C9.2 v1(24.1,6.2) ; v1(26,25.115) 26.005,25.12 27.245,25.12 C20.2 v1(27.25,24)
  Top Layer w1: v1(11.9,26.5) 11.9,27.45 C7.2 ; C7.2@11.95,27.6 v1(11.95,28.6) ; v1(14.3,26.5) C8.2 v1(14.3,28.7) ; C6.2 16.9,27.55 17.1,27.75 17.1,28.595 17.4,28.895 v1(17.4,28.9) ; C5.2@18.55,23.525 C5.2 20,23.275 20.75,22.525 U2.11 22.65,22.525 22.8,22.675 22.8,23.475 23.05,23.725 U2.1 ; v1(23.9,24.05) U2.1 ; v1(25.6,27.55) 24.65,27.55 C3.2 24.6,26.9 v1(23.9,26.2) C4.2 23.05,25.35 U2.1
  Top Layer w1.5: C7.2@11.95,27.6 C7.2 C8.2 C6.2 16.75,27.5 17.891,27.5 18.6,26.791 18.6,23.575 C5.2@18.55,23.525
  Bottom Layer w0.2: C16.1 14.475,9.45 14.475,9.975 v1(14.5,10) ; 33.5,12 33.75,11.75 33.75,11.687 33.812,11.625 v1@33.875,11.625 ; 33.5,14 33.5,16 33.5,18 v1(33.5,18.9)
  Bottom Layer w0.3: C19.2 1.3,6.475 C19.2@1.3,6.425 ; v1(1.3,5.575) C19.2@1.3,6.425 ; C19.2@1.375,6.5 C19.2@1.3,6.425 ; v1(12.25,18) D2.3
  Bottom Layer w0.5: v1(1,9.33) J1.3 J1.5 ; v1(20.5,16.218) 20.52,16.238 20.938,16.238 21.55,16.85 D1.3
  other v1: 32.5,9 32.5,9.75 33.75,11.5 26.5,20.25 25.917,21 26.75,21 25.917,21.75 26.75,21.75 20.6,22.6 21.3,22.623 22.1,22.623 10.498,23.25
NetC2_1: C2.1 R1.2 R2.1 | length 3.1
  Top Layer w0.5: R1.2 1.6,18.65 ; C2.1 1.6,18.65 ; R2.1@3.3,18.65 1.6,18.65
NetC5_1: C5.1 C6.1 C7.1 C8.1 C22.1 U2.6 U2.7 U4.1 U4.3 | length 20.7
  Top Layer w0.2: U4.3 6.556,24.956 6.556,25.633 6.673,25.75 8.427,25.75
  Top Layer w0.5: U2.6 U2.7
  Top Layer w1: C22.1 8.427,26.623 8.427,25.75 U4.1@8.427,24.95 ; C6.1 16.9,24.8 17.1,24.6 17.1,22.525 17.7,21.925 C5.1 19.725,21 U2.6
  Top Layer w1.5: C22.1@8.427,26.625 9.216,26.625 10.991,24.85 11.95,24.85 C7.1 C8.1 C6.1
NetC19_1: C19.1 D3.1 J1.1 | length 8.1
  Top Layer w0.5: v1(3.658,6.5) 3.665,6.493 3.665,5.653 6.263,3.055 D3.1
  Bottom Layer w0.5: J1.1 C19.1 2.612,6.513 3.646,6.513 v1(3.658,6.5)
NetLED1_1: "PA15 BLUE.1" R3.2 | length 29.8
  Top Layer w0.2: v1(21.75,1.5) 22.7,1.5 R3.2 ; v1(32.75,17) 33.305,16.445 33.305,14.77 33.195,14.66 33.195,11.087 33.75,10.532 v1(33.75,6.75)
  Bottom Layer w0.2: v1(21.75,1.5) 22.698,0.552 28.247,0.552 28.752,1.057 28.752,3.528 31.974,6.75 v1(33.75,6.75) ; 32,18 32,17.25 32.25,17 v1(32.75,17)
NetLED2_1: "PB3 RED.1" R6.2 | length 22.6
  Top Layer w0.2: R6.2 25.648,0.552 29.252,0.552 29.93,1.23 29.93,4.905 33.055,8.029 33.055,10.73 32.75,11.035 v1(32.75,15)
  Bottom Layer w0.2: 32,16 32,15.25 32.25,15 v1(32.75,15)
NetLED3_1: "PB4 YELLOW.1" R7.2 | length 20.7
  Top Layer w0.2: v1(25.7,1.5) 26.7,1.5 R7.2
  Bottom Layer w0.2: v1(25.7,1.5) 26.255,0.945 28.142,0.945 28.4,1.203 28.4,3.674 34.305,9.579 34.305,12.352 33.657,13 33,13 32,14
NetLED4_1: "PB5 GREEN.1" R8.2 | length 13.3
  Top Layer w0.2: v1(27.75,1.5) 28.7,1.5 R8.2
  Bottom Layer w0.2: v1(27.75,1.5) 27.75,3.522 31.8,7.572 31.8,11.8 32,12
NRST: C16.2 J1.10 R4.1 U3.7 | length 27.8
  Top Layer w0.2: v1(3.1,14.2) 3.1,8.65 v1(4.8,6.95)
  Top Layer w0.254: v1(15.913,9.296) 15.913,9.226 16.541,8.598 16.541,7.834 U3.7
  Bottom Layer w0.2: v1(3.1,14.2) 3.152,14.2 3.552,14.6 6.1,14.6 6.5,14.2 J1.10 ; v1(4.8,6.95) 4.805,6.945 15.345,6.945 15.5,7.1 15.5,7.75 15.462,7.787 R4.1 C16.2
  Bottom Layer w0.254: C16.2 15.671,9.296 v1(15.913,9.296)
PA0: P3.25 U3.10 | length 14.6
  Top Layer w0.2: U3.10 18.05,7.173 18.148,7.075 18.148,7.033 20.24,4.941 26.337,4.941 27.478,6.083 27.478,8.954 27.525,9 P3.25
PA1: P3.24 U3.11 | length 14.7
  Top Layer w0.2: U3.11 18.55,7.173 18.648,7.075 18.648,7.033 20.388,5.293 26.191,5.293 26.9,6.002 26.9,8.581 26.612,8.869 26.612,9.312 26.781,9.481 27.681,9.481 P3.24
PA2/USART2_TX: P3.23 U3.12 | length 14.2
  Top Layer w0.2: U3.12 19.05,7.2 20.605,5.645 26.045,5.645 26.5,6.1 26.5,8.483 26.131,8.852 26.131,9.5 26.612,9.981 27.681,9.981 P3.23
PA3/USART2_RX: P3.22 U3.13 | length 7.6
  Top Layer w0.2: U3.13 25.35,9.35 26.5,10.5 P3.22
PA4/SPI1_NSS/PWM_TIM14: P3.21 U3.14 | length 7.6
  Top Layer w0.2: U3.14 25.348,9.85 26.498,11 P3.21
PA5/SPI1_SCK: P3.20 U3.15 | length 7.6
  Top Layer w0.2: U3.15 25.35,10.35 26.5,11.5 P3.20
PA6/SPI1_MISO: P3.19 U3.16 | length 7.6
  Top Layer w0.2: U3.16 25.3,10.85 26.45,12 P3.19
PA7/SPI1_MOSI: P3.18 U3.17 | length 7.6
  Top Layer w0.2: U3.17 25.3,11.35 26.45,12.5 P3.18
PA8/PWM_TIM1: P3.7 U3.29 | length 12.3
  Top Layer w0.2: U3.29 17.05,17.27 17.159,17.379 17.159,17.382 18.338,18.56 25.971,18.56 26.532,18 P3.7
PA9: P3.6 U3.30 | length 12.9
  Top Layer w0.2: U3.30 16.569,16.394 16.569,17.287 16.807,17.524 16.807,17.527 18.192,18.912 26.155,18.912 26.559,18.509 27.691,18.509 P3.6
PA10: P3.5 U3.31 | length 13.5
  Top Layer w0.2: U3.31 16.069,16.394 16.069,17.285 16.455,17.67 16.455,17.673 18.046,19.264 26.301,19.264 26.557,19.009 27.691,19.009 P3.5
PA11/CAN_RX: U1.4 U3.32 | length 13.9
  Top Layer w0.203: U1.4 6.946,17.75 6.556,17.36 6.556,16.994 6.258,16.695 6.258,16.008 6.945,15.321 12.75,15.321 13.226,14.845 15.342,14.845 15.55,15.053 U3.32
PA12/CAN_TX: U1.1 U3.33 | length 8.8
  Top Layer w0.203: U1.1 12.9,15.8 13.5,15.2 14.85,15.2 15.05,15.4 U3.33
PA13/SWDIO: J1.2 U3.34 | length 22.8
  Top Layer w0.2: U3.34 14.55,17.18 14.924,17.554 15.554,17.554 v1(15.9,17.9) ; v1(16.25,14.996) 16.25,10.598 v1(17,9.848)
  Bottom Layer w0.2: J1.2@6.48,8.08 7.442,8.08 7.926,8.564 9.939,8.564 11.93,10.555 16.293,10.555 v1(17,9.848) ; v1(15.9,17.9) 16.25,17.55 v1(16.25,14.996)
PA14/SWCLK: J1.4 U3.37 | length 14.5
  Top Layer w0.2: v1(4.477,9.423) 4.477,14 5.327,14.85 U3.37
  Bottom Layer w0.2: v1(4.477,9.423) 6.407,9.423 J1.4
PA15/LED_BLUE: P3.39 R3.1 U3.38 | length 47.6
  Top Layer w0.2: v1(9.625,14) 9.704,14 10.054,14.35 U3.38 ; R3.1 v1(22.75,4) ; v1(29.709,16.6) 29.786,16.523 29.786,16.295 30.483,15.598 30.525,15.598 30.623,15.5 P3.39
  Bottom Layer w0.2: v1(9.625,14) 9.657,14 10.067,14.41 15.09,14.41 15.705,13.795 25.195,13.795 28,16.6 v1(29.709,16.6) 29.786,16.523 29.786,16 31.314,14.472 31.314,9.414 29.66,7.76 29.66,5.929 27.176,3.445 23.305,3.445 v1(22.75,4)
PB0/PWM_TIM3: P3.17 U3.18 | length 7.6
  Top Layer w0.2: U3.18 25.15,11.85 26.281,12.981 27.681,12.981 P3.17
PB1: P3.16 U3.19 | length 7.6
  Top Layer w0.2: U3.19 25,12.35 26.131,13.481 27.681,13.481 P3.16
PB2: P3.15 U3.20 | length 7.6
  Top Layer w0.2: U3.20 24.9,12.85 26.05,14 P3.15
PB3_LED_RED: P3.38 R6.1 U3.39 | length 41.8
  Top Layer w0.203: v1(10.498,13.623) 10.724,13.85 U3.39 ; R6.1 24.8,3.05 v1(24.8,4) ; v1(29.2,15.8) 30,15 P3.38
  Bottom Layer w0.203: v1(10.498,13.623) 10.931,14.056 14.909,14.056 15.575,13.39 25.808,13.39 28.218,15.8 v1(29.2,15.8) 29.391,15.8 30.96,14.231 30.96,9.56 29.306,7.906 29.306,6.076 27.23,4 v1(24.8,4)
PB4_LED_YELLOW: P3.37 R7.1 U3.40 | length 35.2
  Top Layer w0.2: U3.40 13.74,13.35 13.89,13.5 v1(14,13.5) ; R7.1 26.75,3.8
  Top Layer w0.203: 26.75,3.8 26.75,4.352 28.187,5.789 28.187,7.546 29.689,9.048 v1(29.689,9.1) ; v1(29.109,15) 29.216,15 29.704,14.512 31.288,14.512 P3.37
  Bottom Layer w0.203: v1(14,13.5) 14.774,13.5 15.392,12.881 26.218,12.881 28.337,15 v1(29.109,15) 29.689,15 30.605,14.083 30.605,10.016 v1(29.689,9.1)
PB5_LED_GREEN: P3.36 R8.1 U3.41 | length 32.9
  Top Layer w0.203: U3.41 12.044,12.869 v1(14.619,12.869) ; v1(28.744,6.3) 28.744,3.006 R8.1 ; v1(29.229,14.2) 29.273,14.156 29.93,14.156 30.087,14 P3.36
  Bottom Layer w0.203: v1(14.619,12.869) 14.727,12.869 15.069,12.526 26.886,12.526 28.56,14.2 v1(29.229,14.2) 29.986,14.2 30.25,13.936 30.25,10.582 28.744,9.075 v1(28.744,6.3)
PB6/DEBUG_USART1_TX: J1.6 P3.34 U3.42 | length 29
  Top Layer w0.2: U3.42 12.029,12.346 13.21,12.346 v1(13.736,11.82) ; v1(29.694,13.594) 30.268,13.019 31.281,13.019 P3.34
  Bottom Layer w0.2: J1.6 8.934,10.6 10.154,11.82 v1(13.736,11.82) 14.239,11.82 14.434,11.625 28.64,11.625 29.755,12.739 29.755,13.532 v1(29.694,13.594)
PB7/DEBUG_USART1_RX: J1.8 P3.33 U3.43 | length 28.6
  Top Layer w0.2: v1(9.3,11.86) 11.935,11.86 11.975,11.9 U3.43 ; v1(29.2,13) 29.7,12.5 P3.33
  Bottom Layer w0.2: J1.8 6.51,11.86 v1(9.3,11.86) 9.885,12.445 14.239,12.445 14.708,11.977 27.574,11.977 28.597,13 v1(29.2,13)
PB8/I2C1_SCL: P3.32 U3.45 | length 24.3
  Top Layer w0.203: v1(9.85,10.6) 9.959,10.6 10.209,10.85 U3.45 ; v1(29.6,11.8) 29.709,11.8 29.909,12 P3.32
  Bottom Layer w0.203: v1(9.85,10.6) 9.959,10.6 10.622,11.264 29.064,11.264 v1(29.6,11.8)
PB9/I2C1_SDA: P3.31 U3.46 | length 22.7
  Top Layer w0.203: v1(10.7,10.2) 10.809,10.2 10.945,10.337 12.012,10.337 U3.46 ; v1(29.2,10.677) 29.577,10.677 30.381,11.481 31.281,11.481 P3.31
  Bottom Layer w0.203: v1(10.7,10.2) 11.408,10.908 28.968,10.908 v1(29.2,10.677)
PB10/USART3_TX/I2C2_SCL: P3.14 U3.21 | length 7.6
  Top Layer w0.2: U3.21 24.85,13.35 26,14.5 P3.14
PB11/USART3_RX/I2C2_SDA: P3.13 U3.22 | length 7.6
  Top Layer w0.2: U3.22 20.58,13.845 24.845,13.845 26,15 P3.13
PB12/SPI2_NSS: P3.11 U3.25 | length 9.7
  Top Layer w0.2: U3.25 19.05,16.854 19.349,17.152 25.348,17.152 26.5,16 P3.11
PB13/SPI2_SCK: P3.10 U3.26 | length 10.4
  Top Layer w0.2: U3.26 18.55,17.027 18.648,17.125 18.648,17.167 18.985,17.504 25.534,17.504 26.529,16.509 27.691,16.509 P3.10
PB14/SPI2_MISO: P3.9 U3.27 | length 11.1
  Top Layer w0.2: U3.27 18.05,17.248 18.659,17.856 25.68,17.856 26.536,17 P3.9
PB15/SPI2_MOSI: P3.8 U3.28 | length 11.7
  Top Layer w0.2: U3.28 17.569,16.394 17.569,17.294 18.483,18.208 25.825,18.208 26.534,17.5 P3.8
PC13: P3.30 U3.2 | length 23.8
  Top Layer w0.203: v1(14.05,6.35) U3.2 ; v1(20.2,4.155) 20.633,4.588 26.483,4.588 27.832,5.936 27.832,7.838 29.132,9.139 29.132,9.554 30.483,10.904 30.528,10.904 30.624,11 P3.30
  Bottom Layer w0.203: v1(14.05,6.35) 18.005,6.35 v1(20.2,4.155)
PC14/OSC32_IN: U3.3
PC15/OSC32_OUT: U3.4
PF0/OSC_IN: C17.2 U3.5 Y1.1 | length 6.3
  Top Layer w0.254: Y1.1 13.4,2.75 14.6,3.95 C17.2 14.8,5.4 14.8,6.1 15.541,6.841 15.541,7.816 U3.5
PF1/OSC_OUT: C18.2 U3.6 Y1.2 | length 6.2
  Top Layer w0.254: U3.6 16.059,7.816 16.059,6.641 16.8,5.9 16.8,5.45 C18.2@16.55,5.2 ; C18.2 16.725,3.375 Y1.2
VBAT: C3.1 C4.1 C20.1 C21.1 P3.47 P3.48 P3.49 P3.50 U2.3 U2.4
pads on no net: J1.7 J1.9 P1.3 P2.3 P3. P3.12 P3.35 P3.46 U1.5 U1.8 U2.5 U2.8 U2.9 U2.10 U4.4

## Polygon pours and split planes (outlines as drawn)
GND on Top Layer "GND_L01_P193" (solid, remove dead copper, pour order 193): -2.5,32.5 -2.5,-2.5 37.5,-2.5 37.5,32.5